# Altium PCB 175-00002 rev 2, PCB, Sinistro Clock Gen.PcbDoc (part 1 of 6)
Units mil, origin at the board's own origin, x right, y up, seen from the top; angles counter-clockwise.
Board outline 5905.51 x 4330.71 mil, 10 copper layers (Top Layer (.GTL), MidLayer1 (*.G1), +12V (*.GP1), -12V (*.GP2), A & GND (*.GP3), Chassis E (*.GP4), +28V & VCC (*.GP5), MidLayer2 (*.G2), MidLayer3 (*.G3), Bottom Layer (.GBL)), stack 64.6 mil thick; 495 components, 327 nets, 1939 pads, 938 vias.
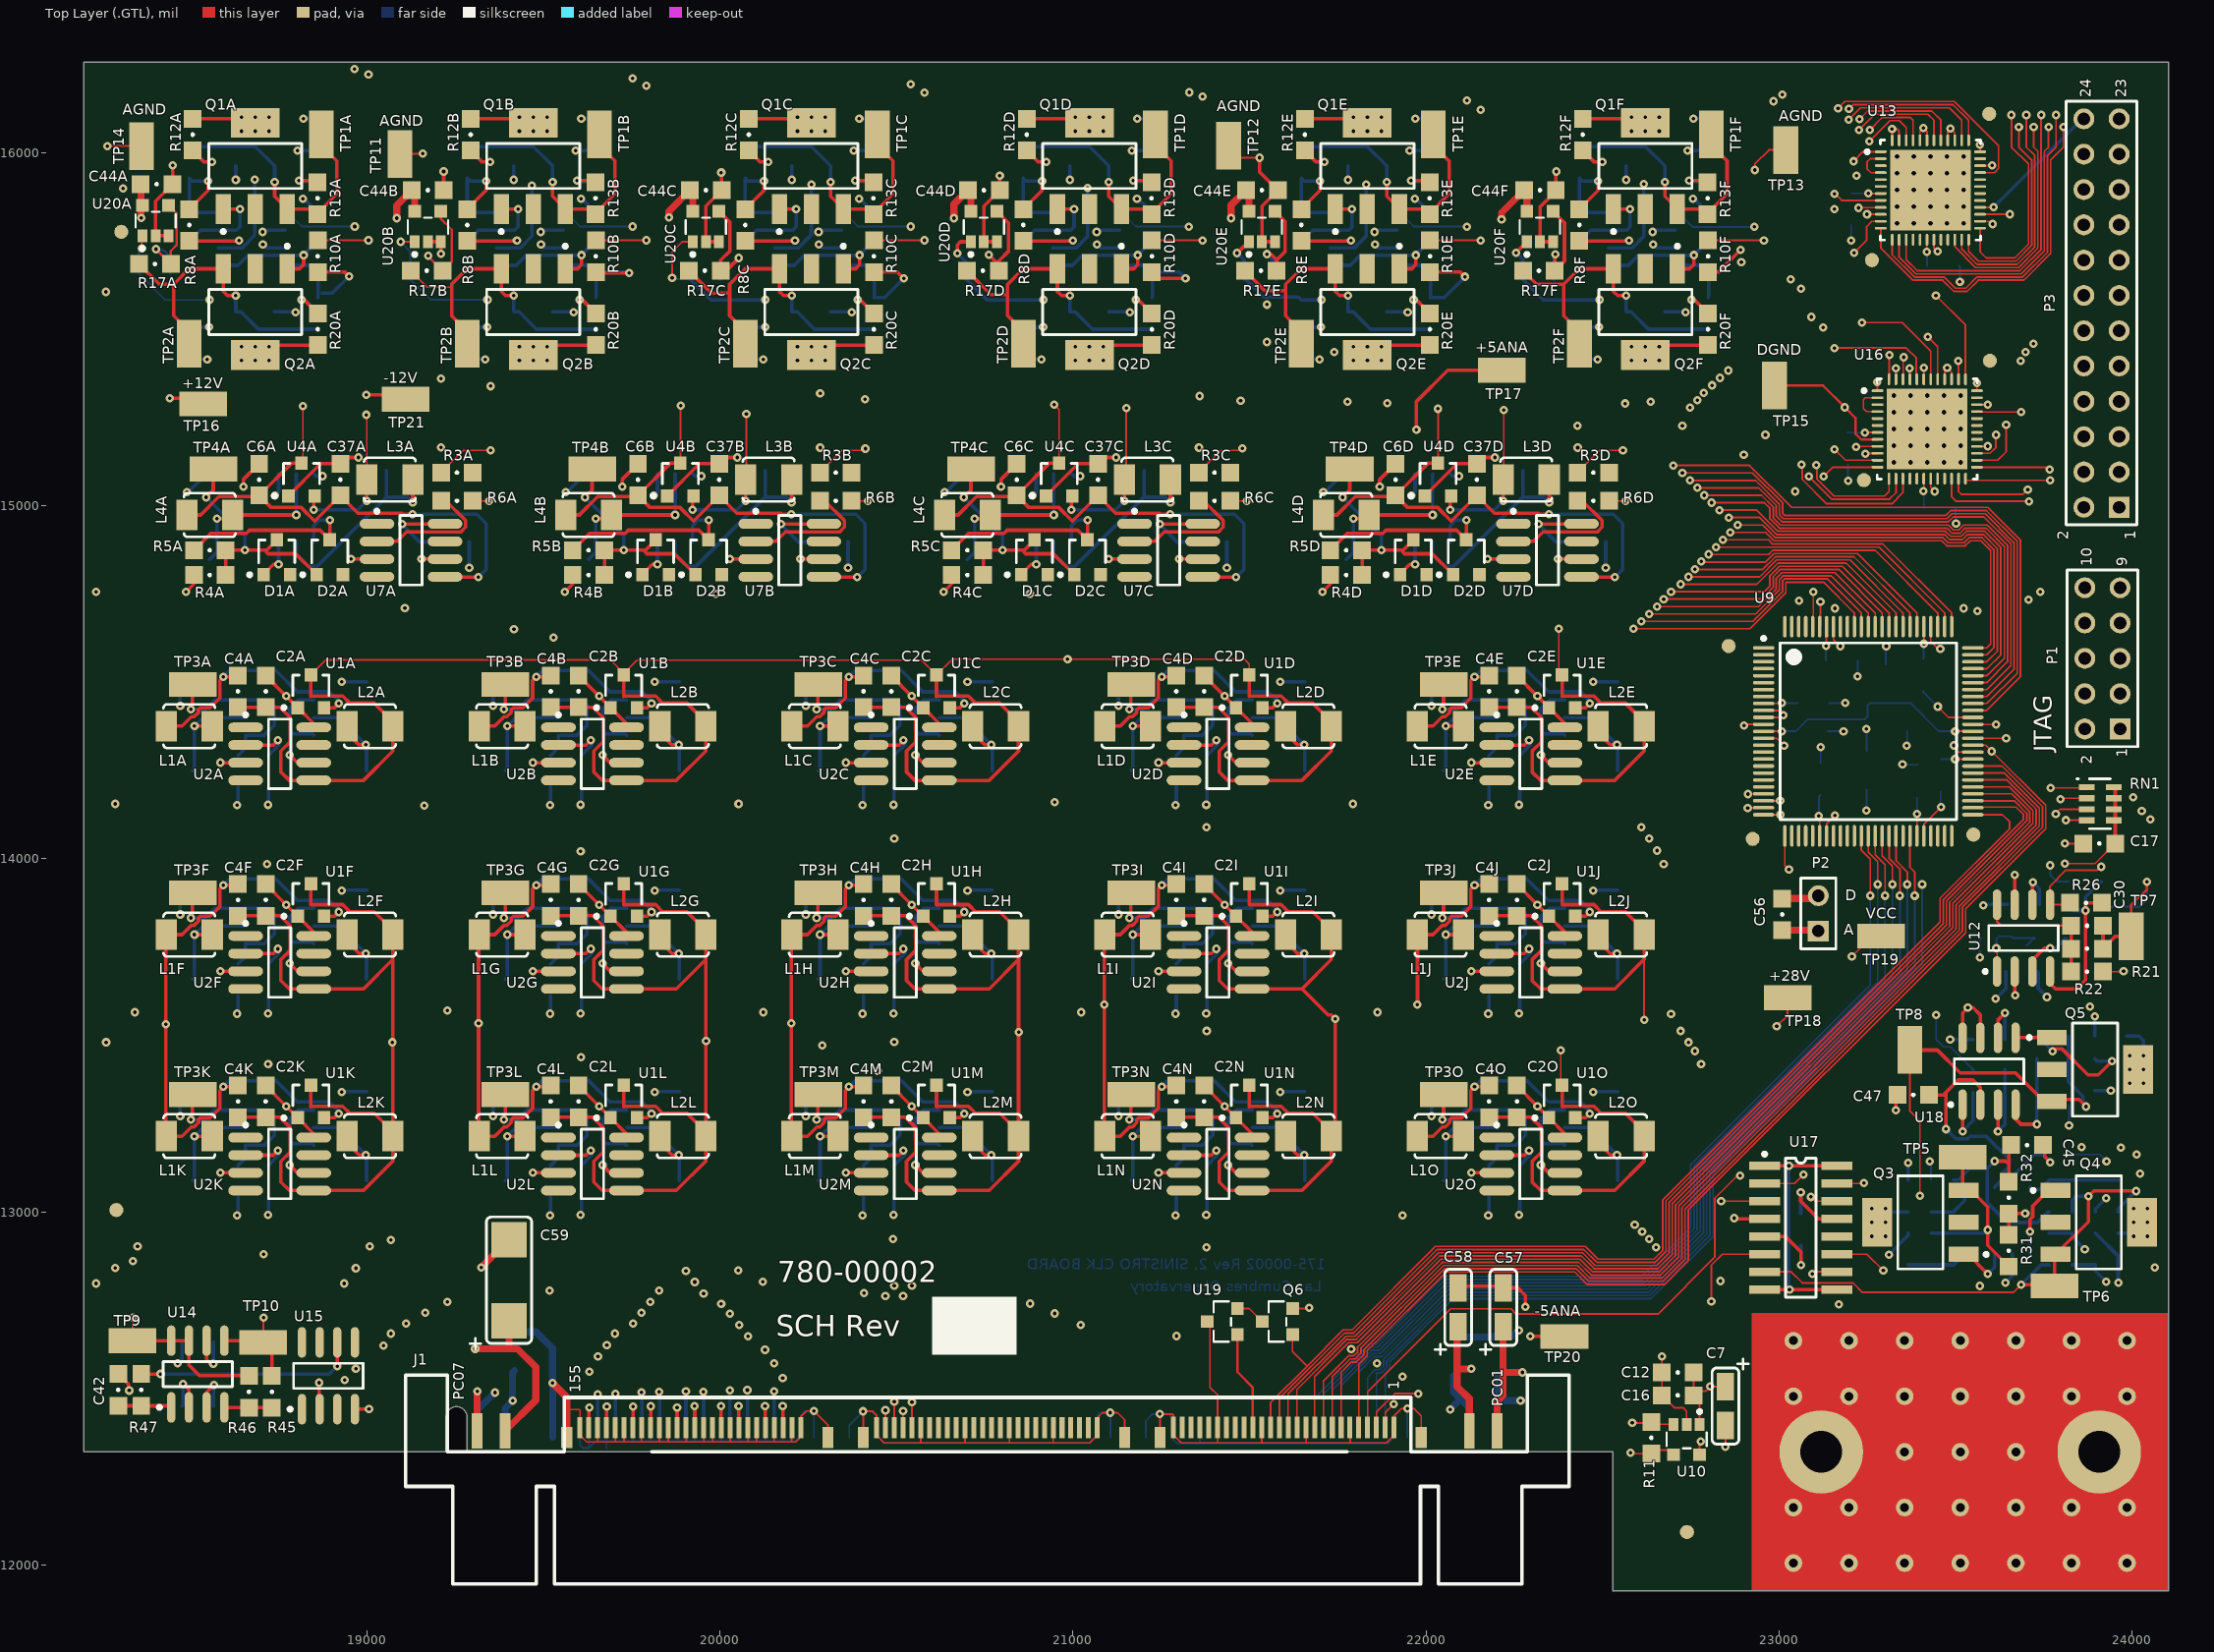
[diagram p0: Top Layer (.GTL) view]
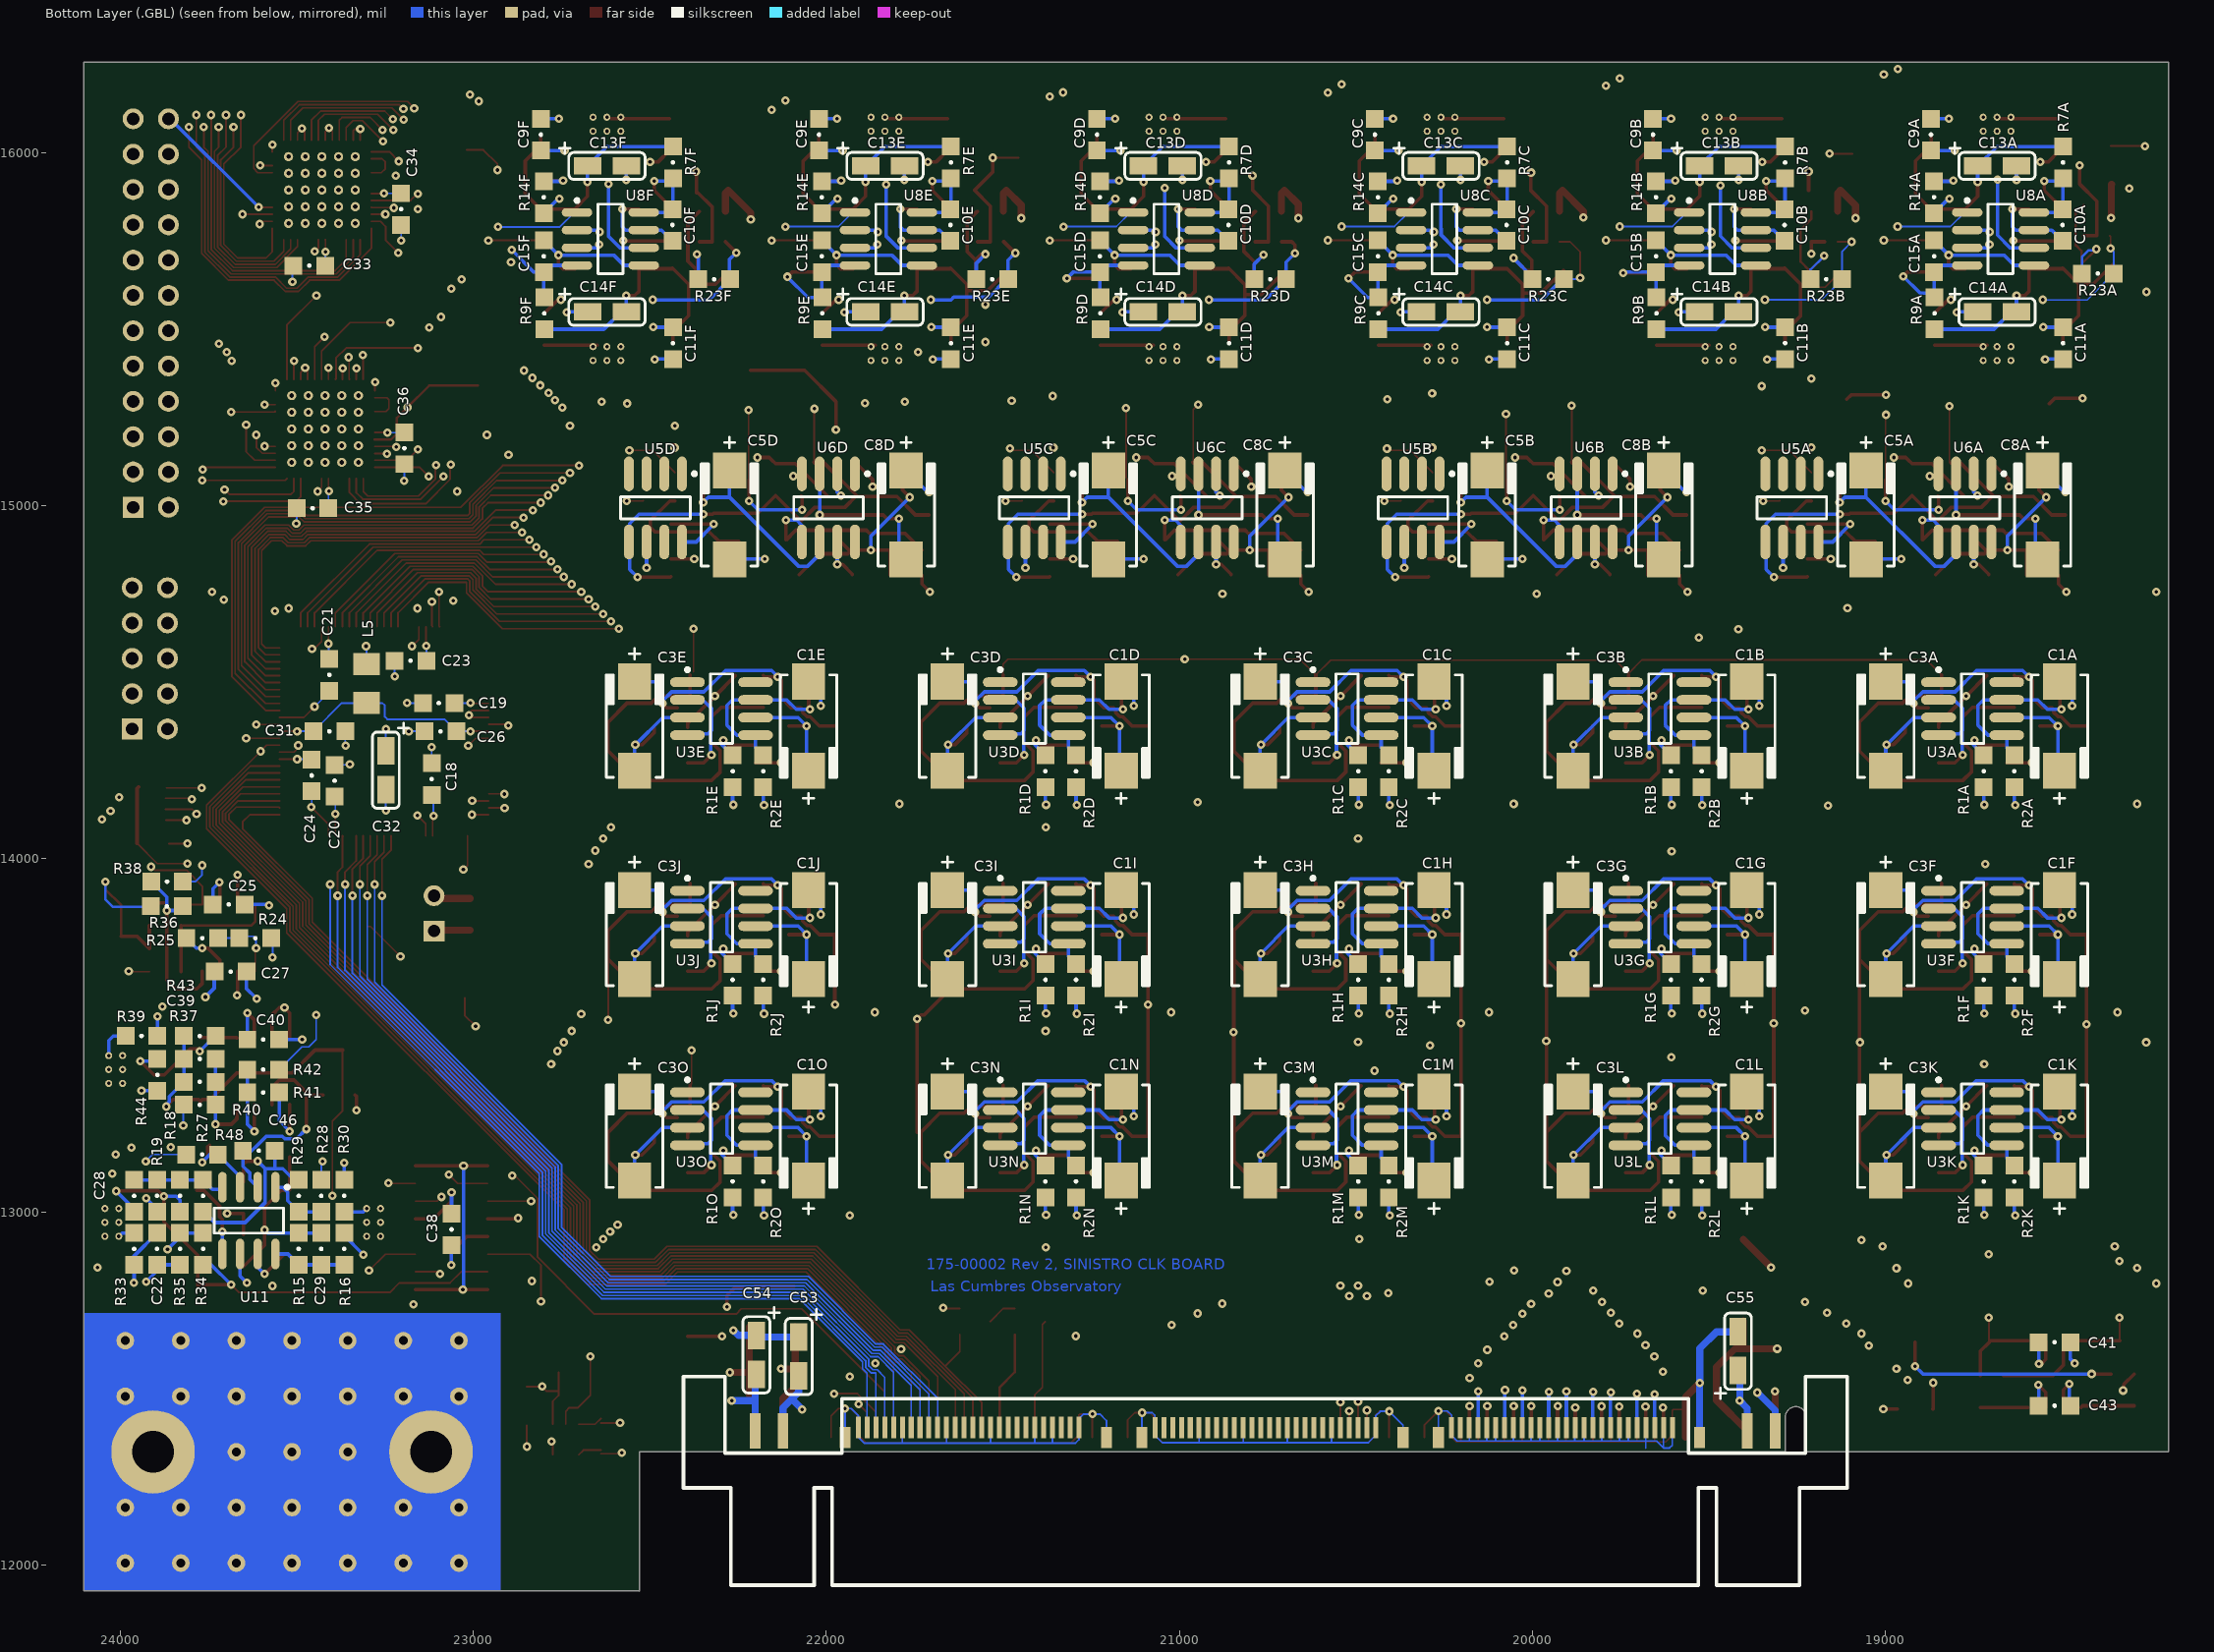
[diagram p1: Bottom Layer (.GBL) view, seen from below]
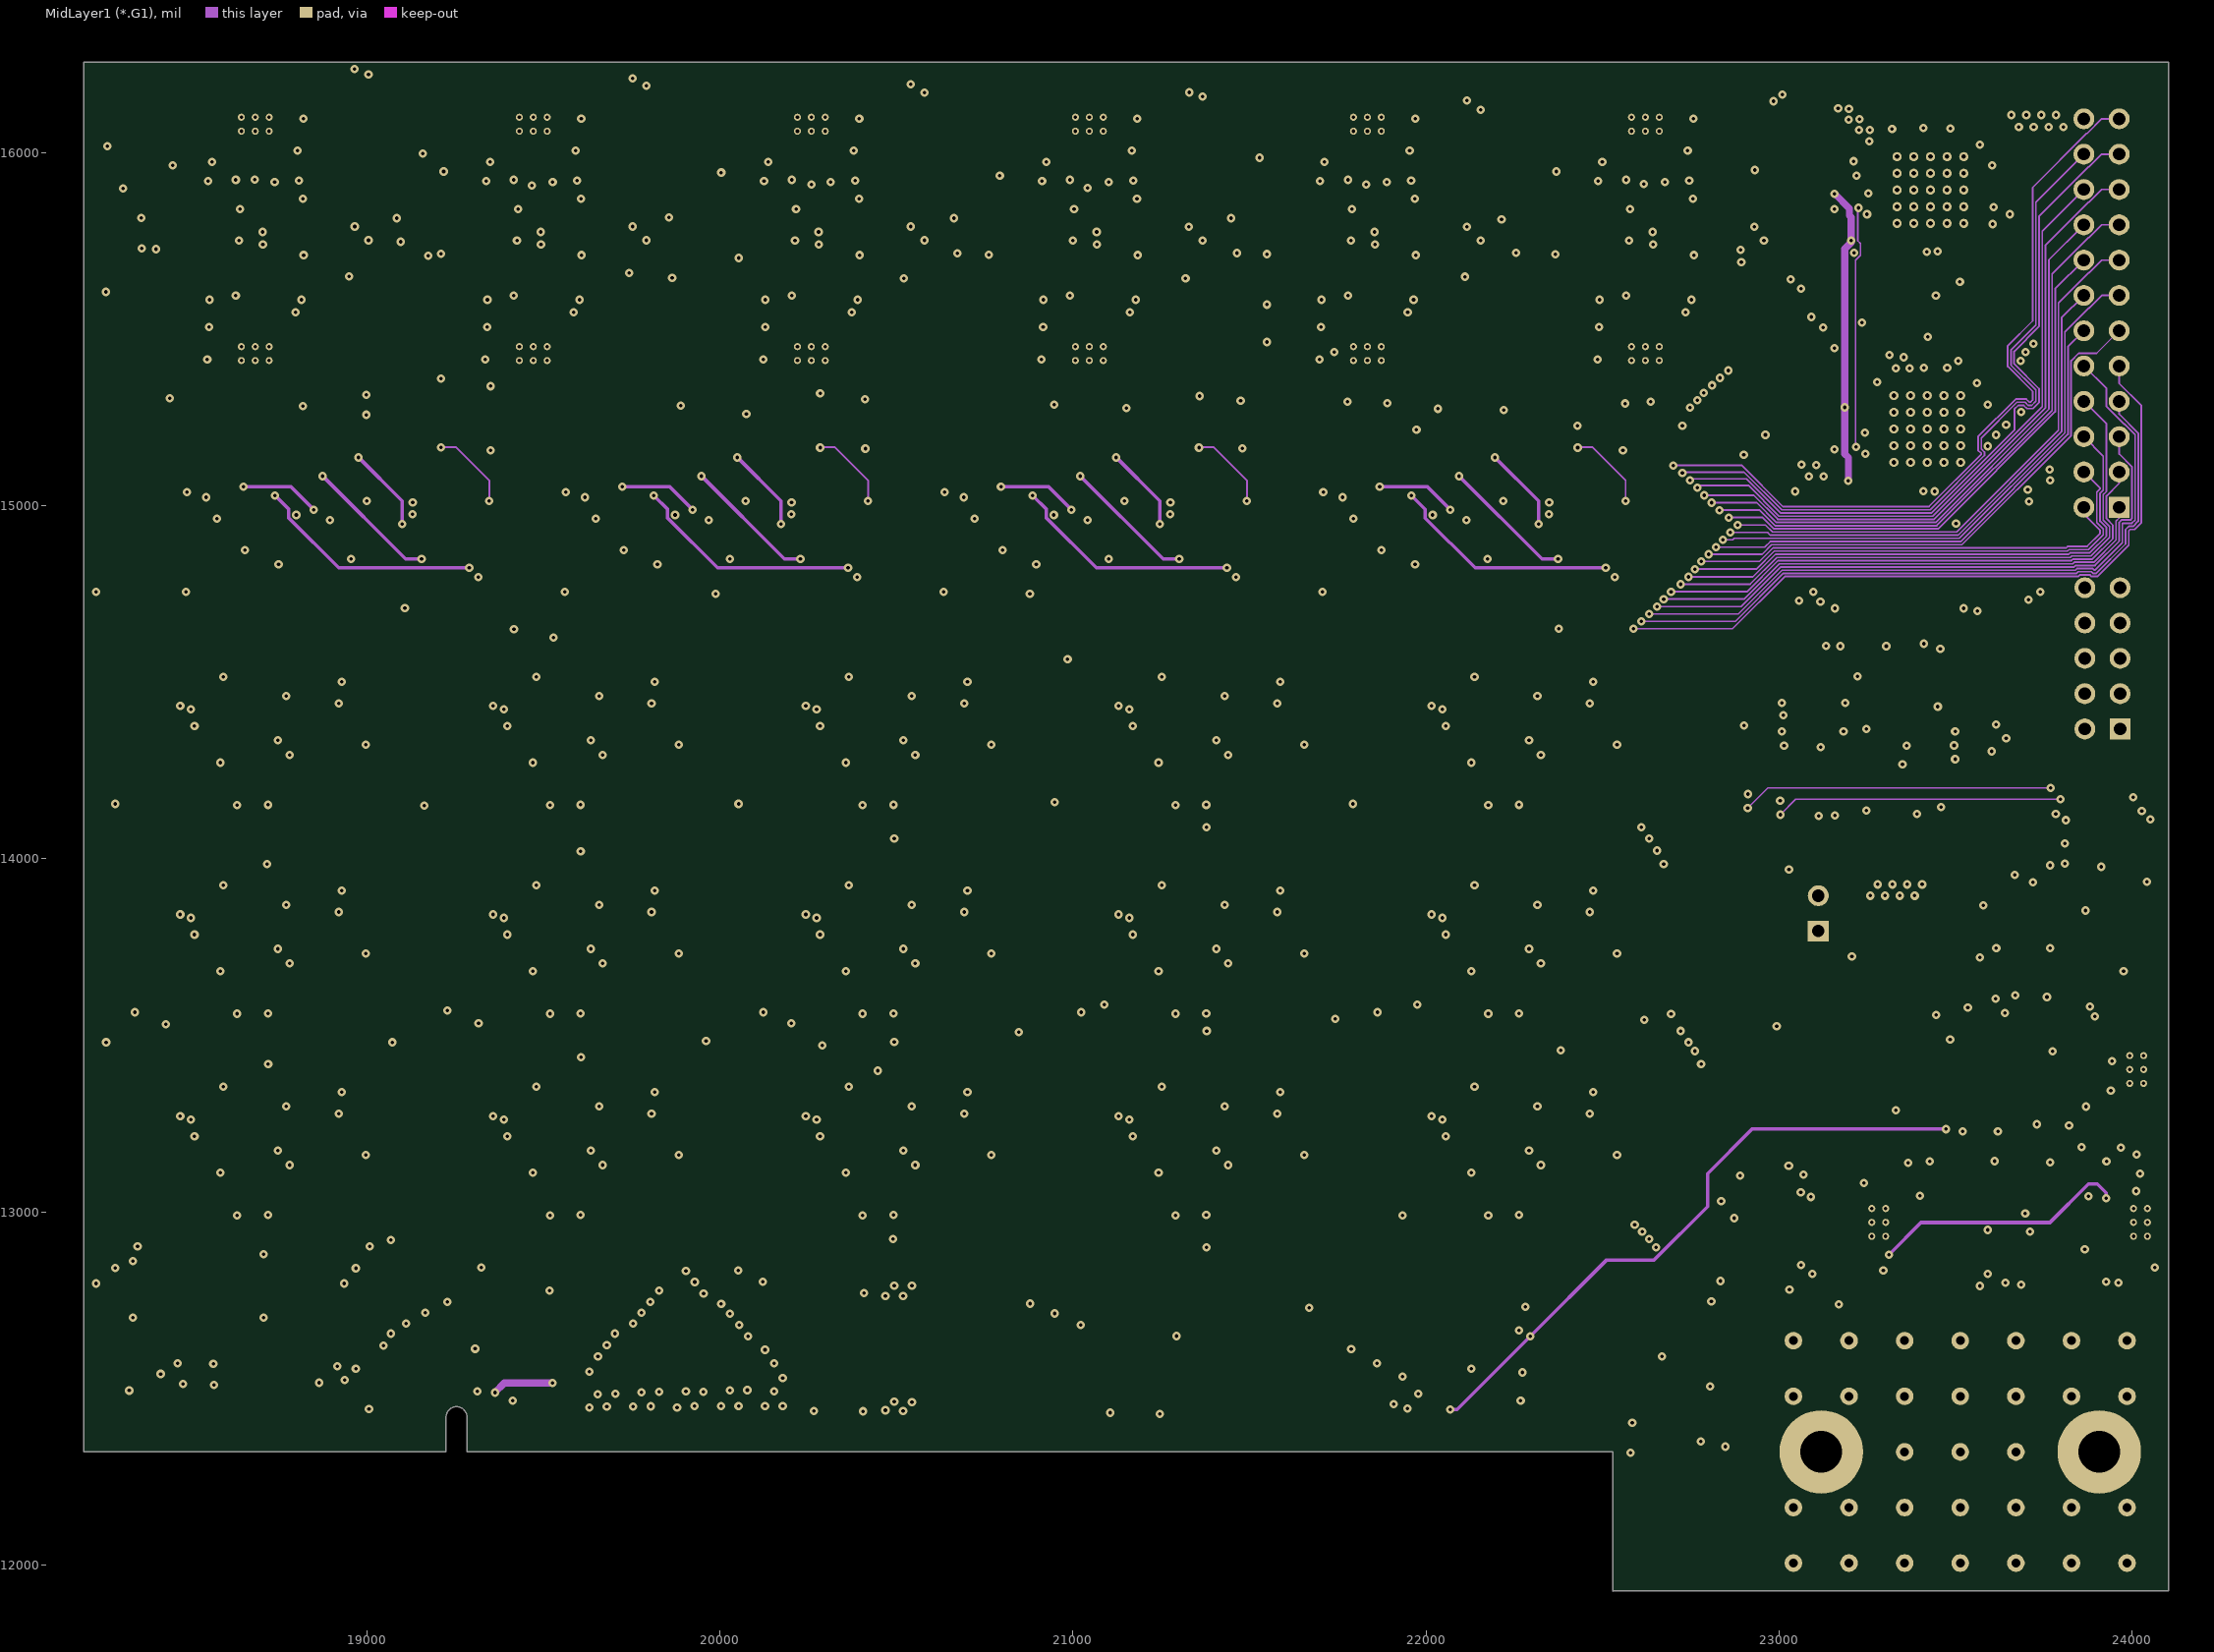
[diagram p2: MidLayer1 (*.G1)]
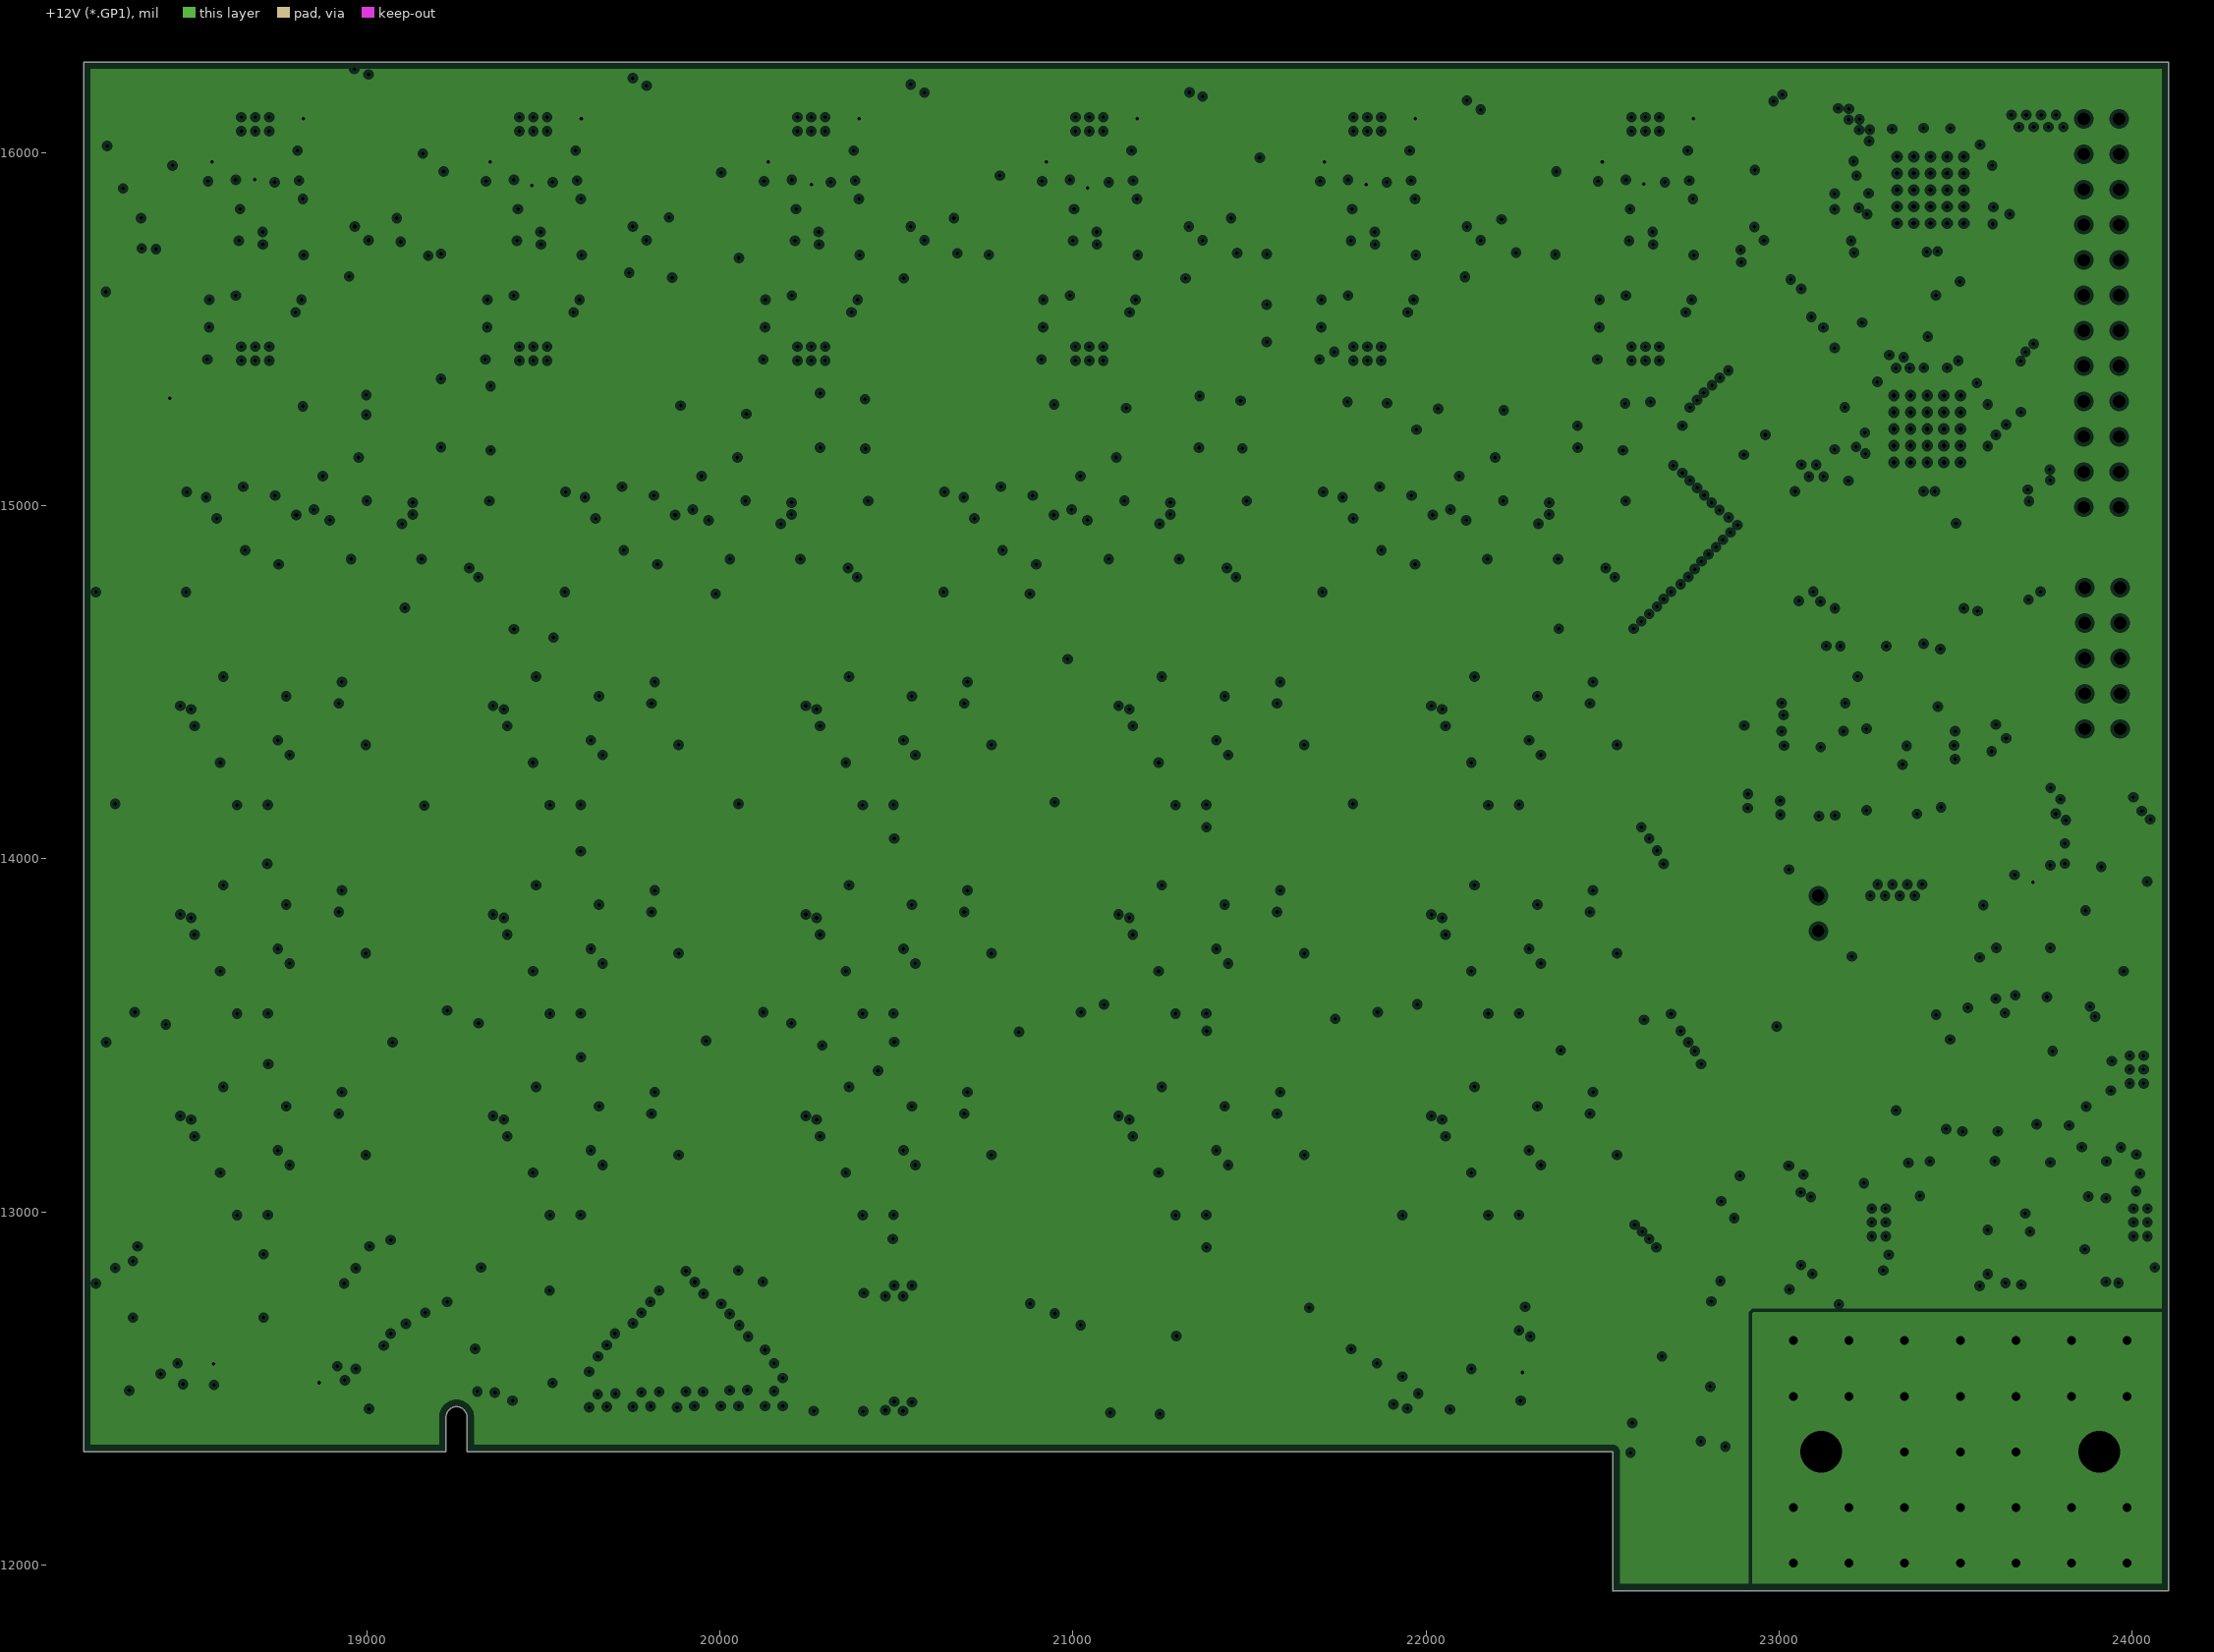
[diagram p3: +12V (*.GP1), clearances drawn from the general rule]
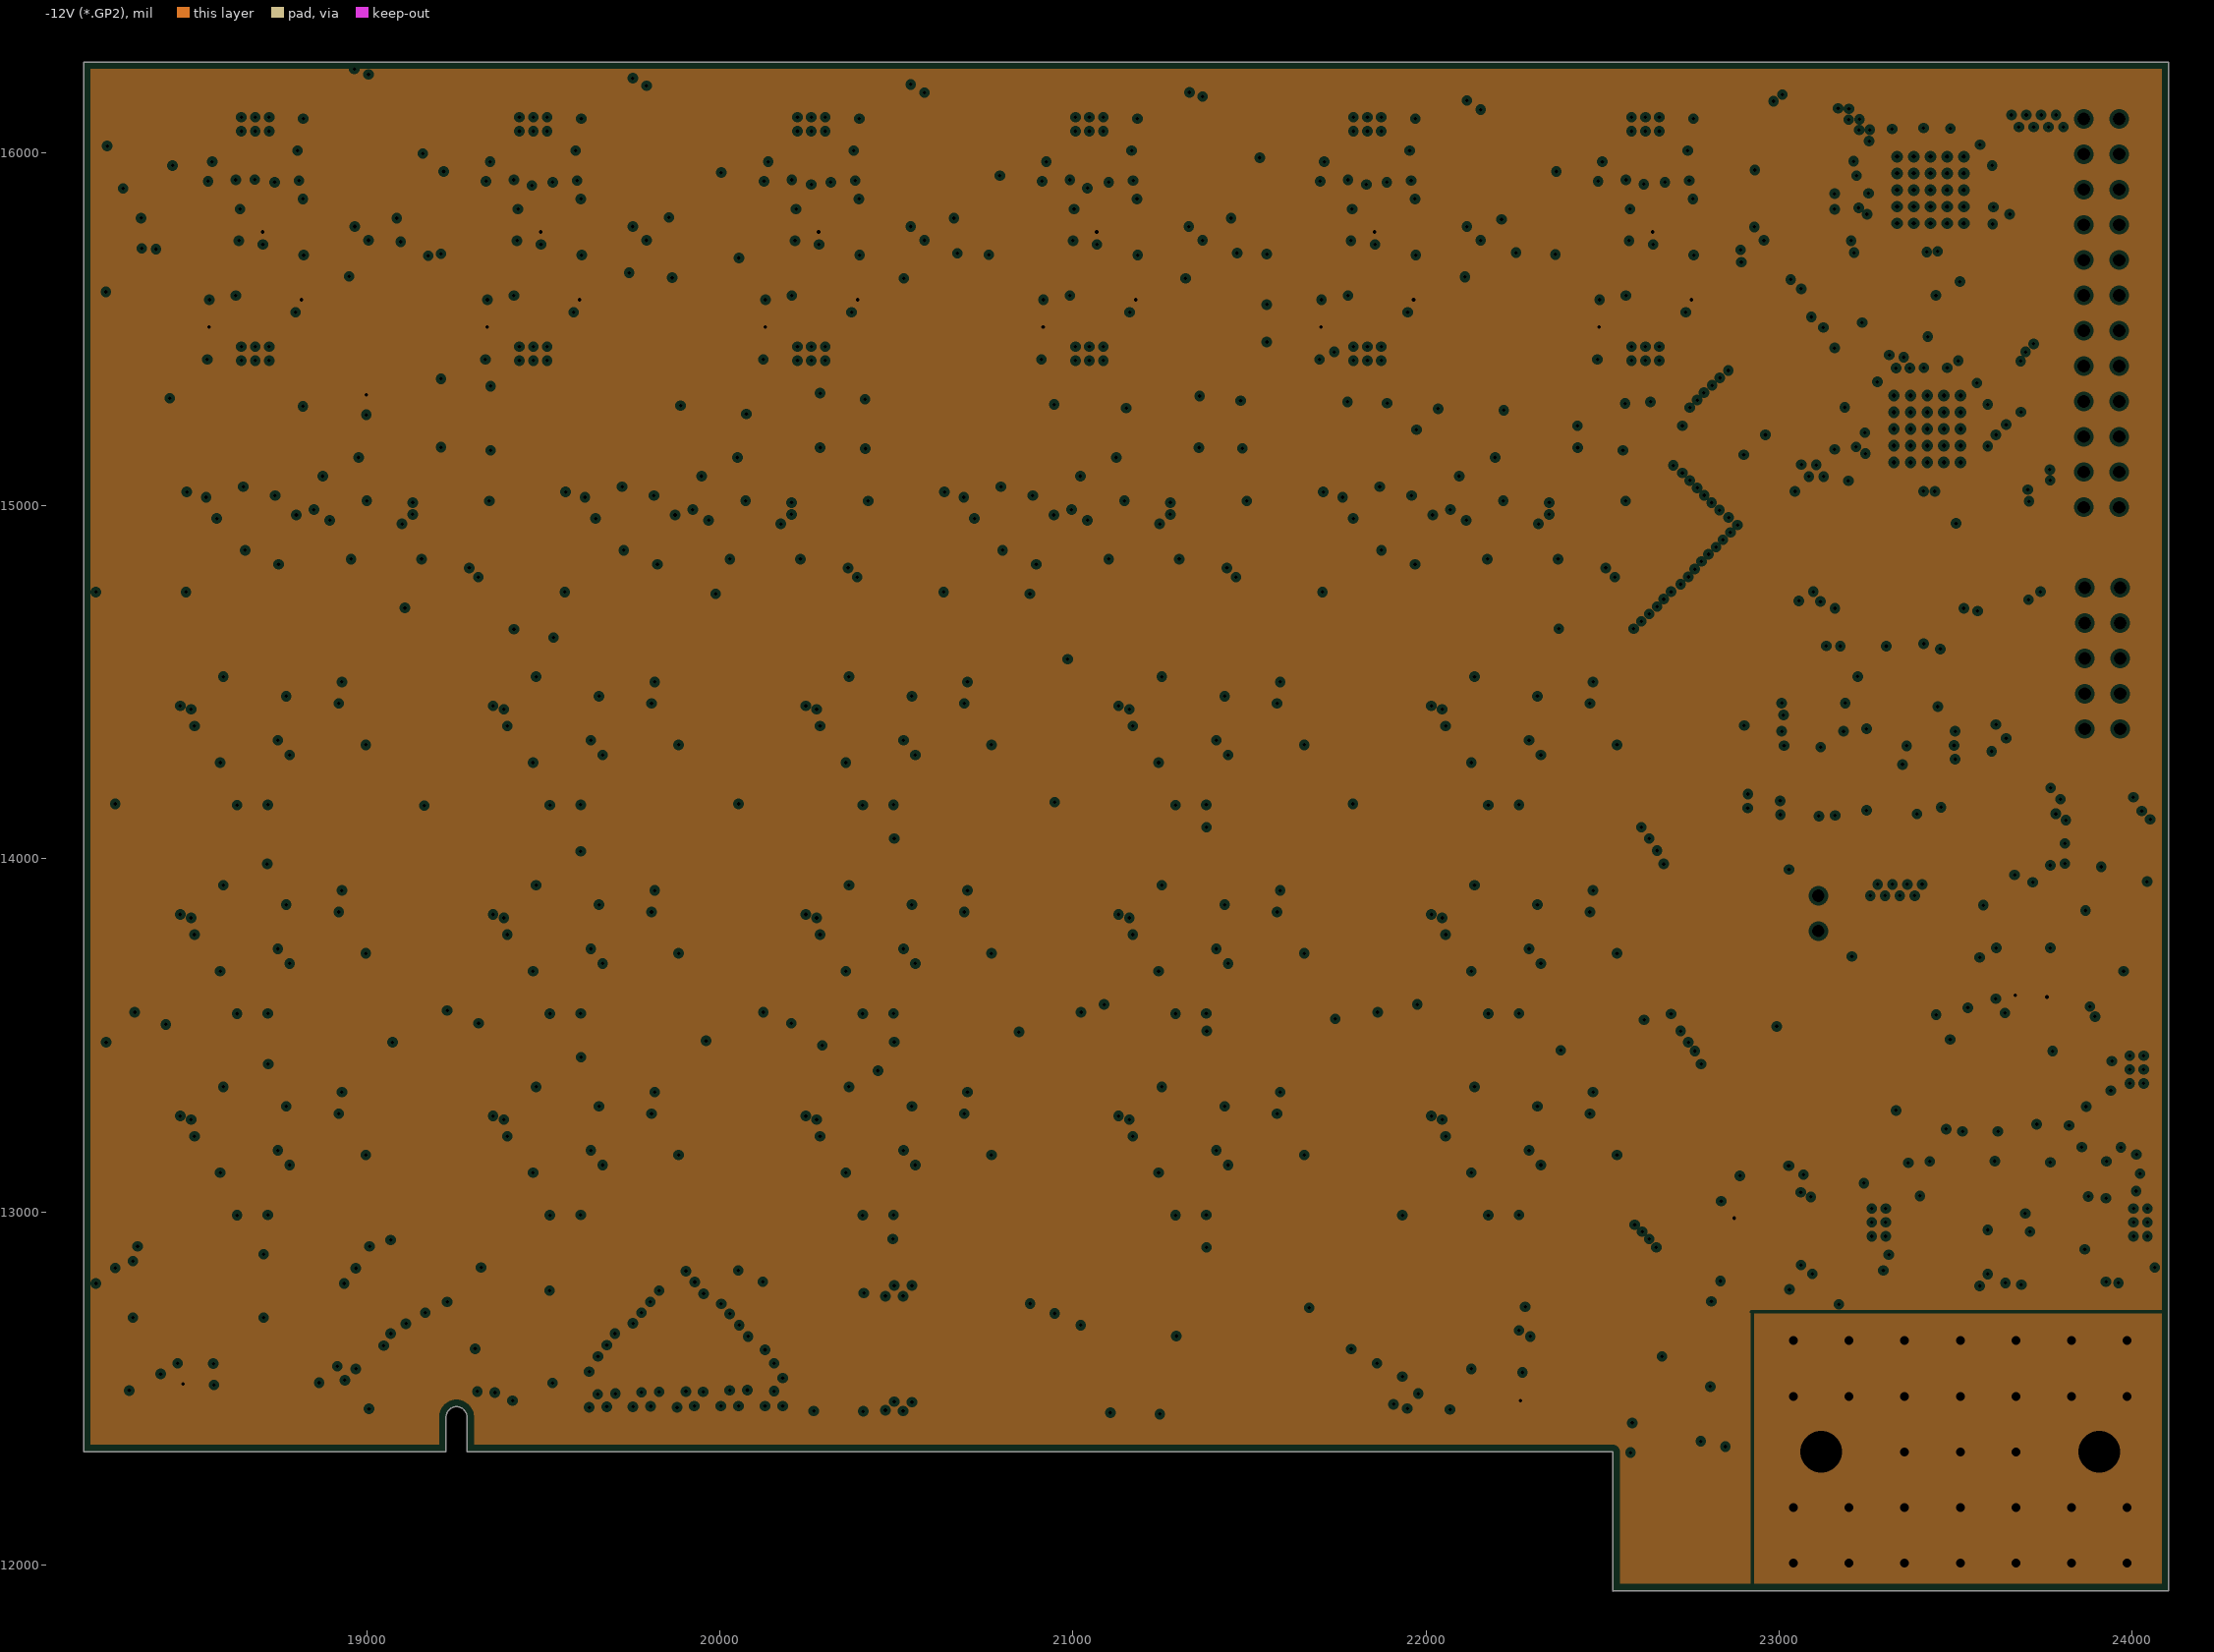
[diagram p4: -12V (*.GP2), clearances drawn from the general rule]
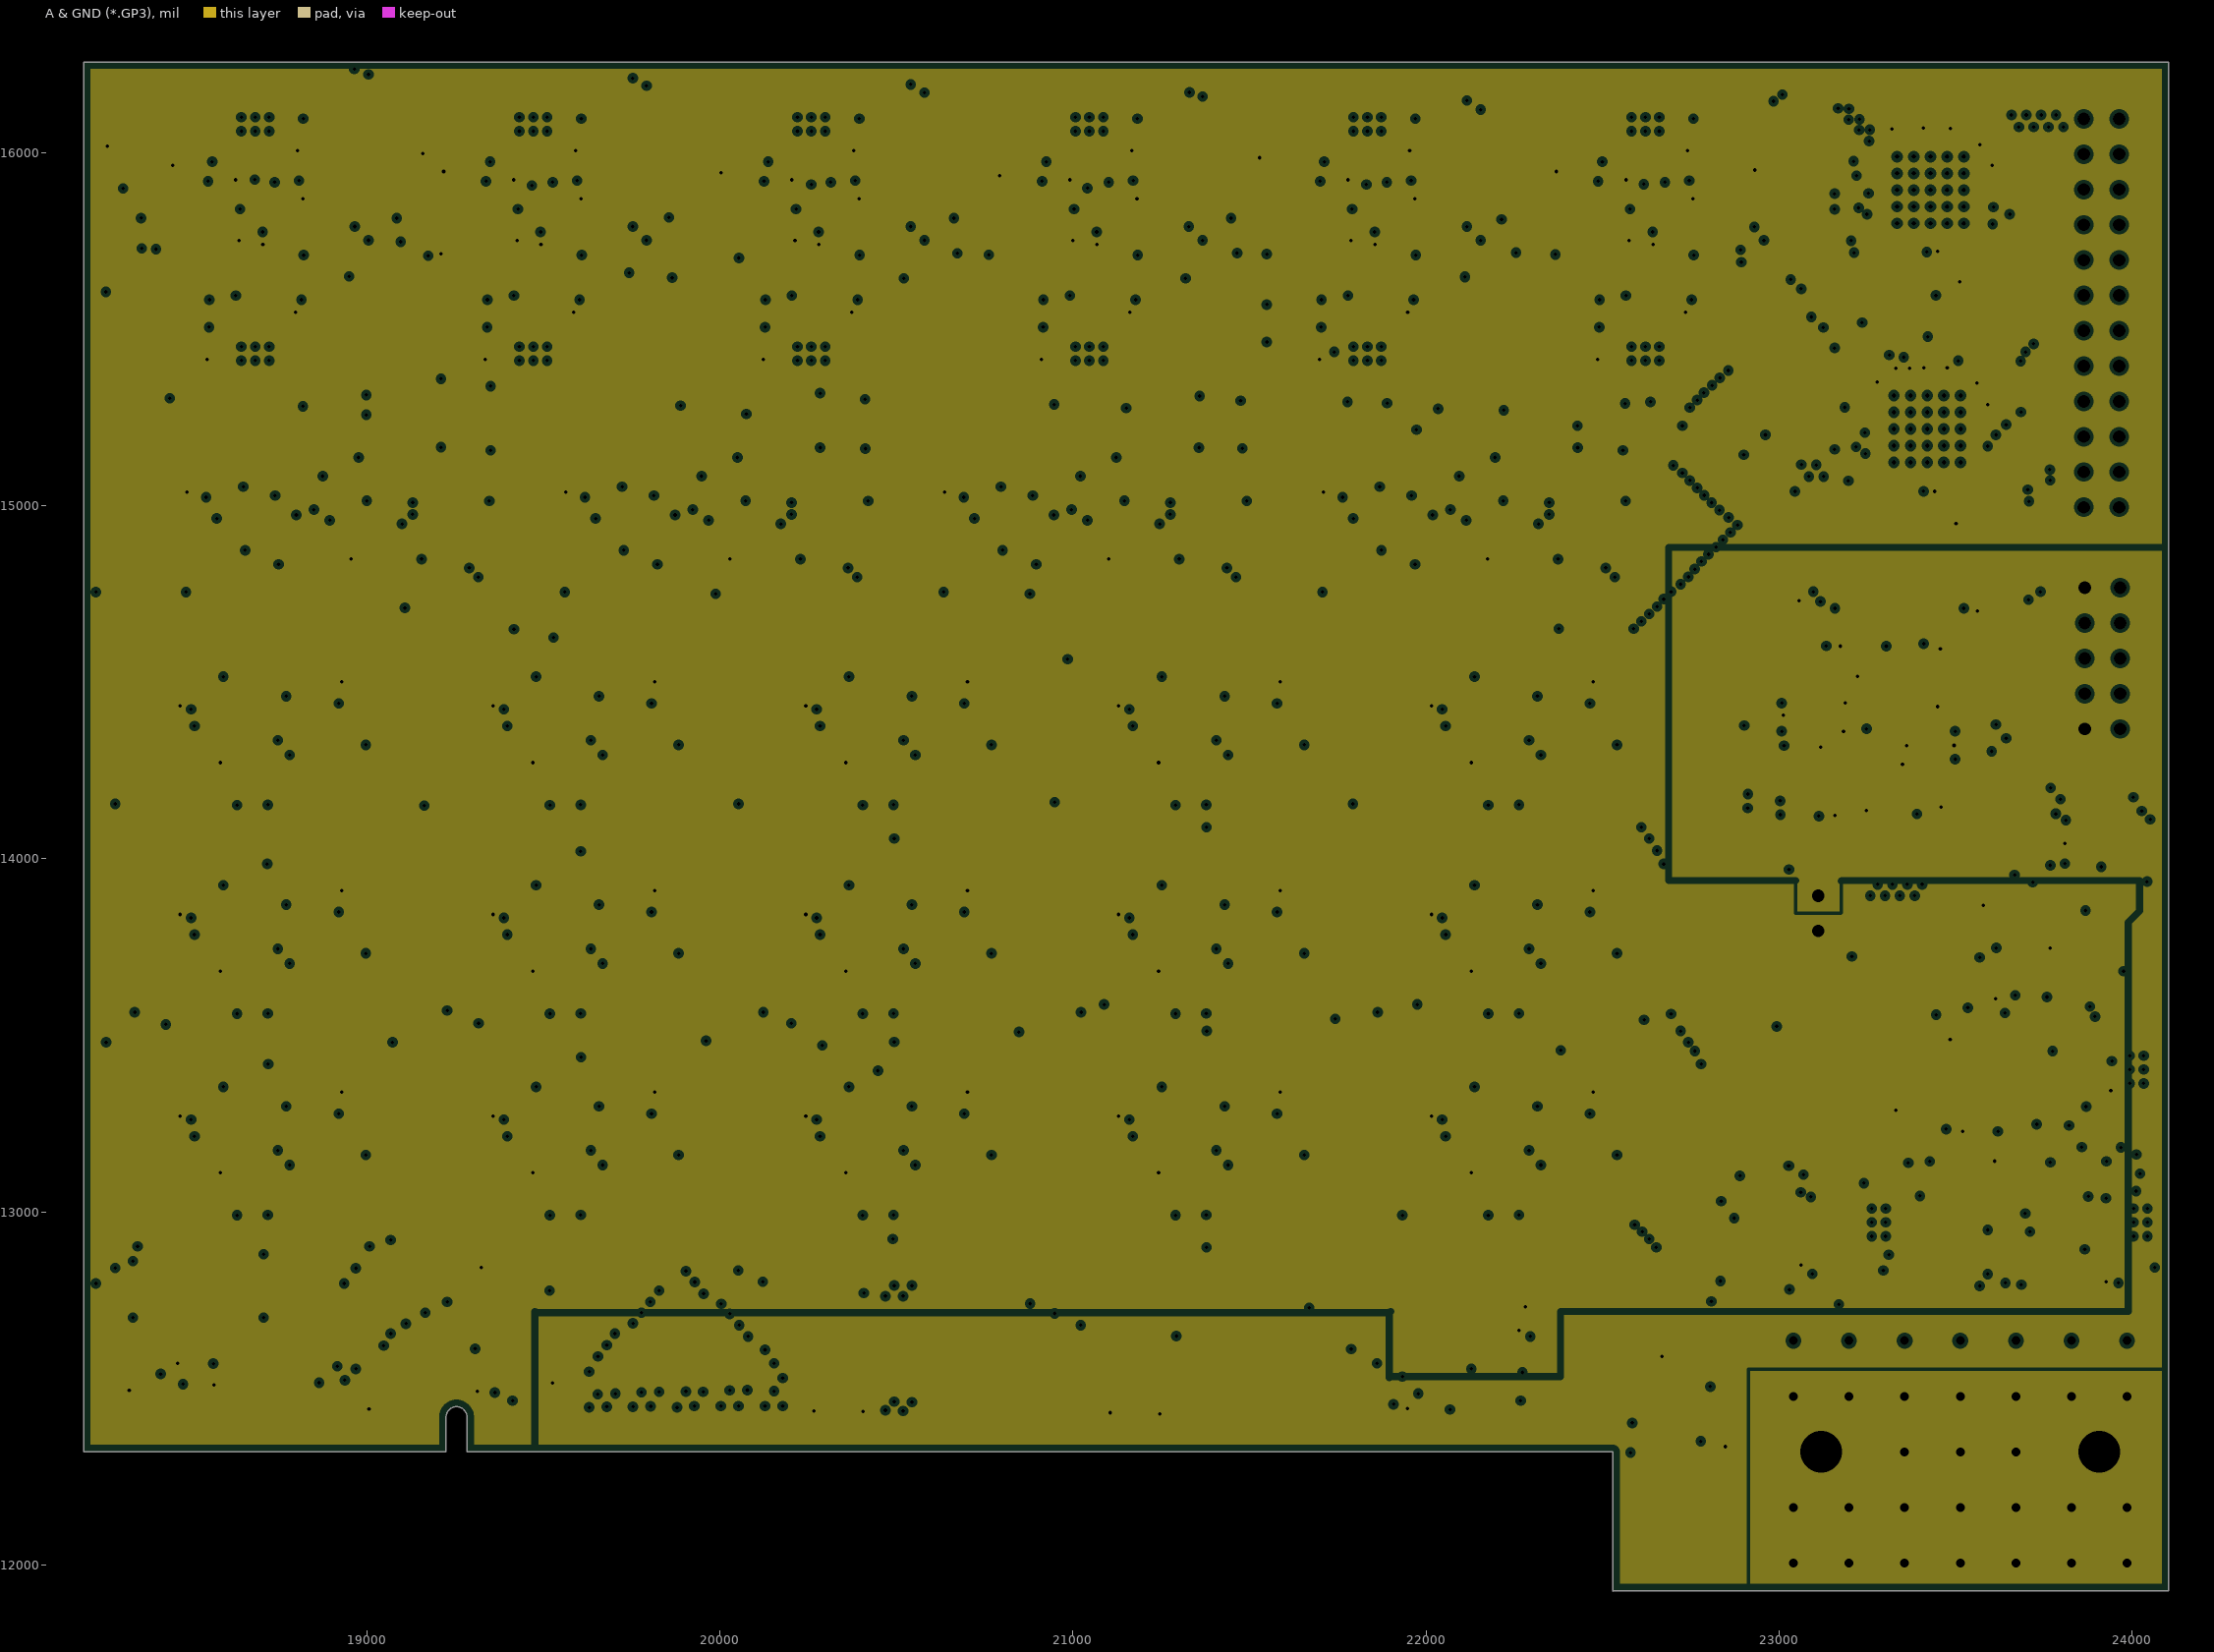
[diagram p5: A & GND (*.GP3), clearances drawn from the general rule]
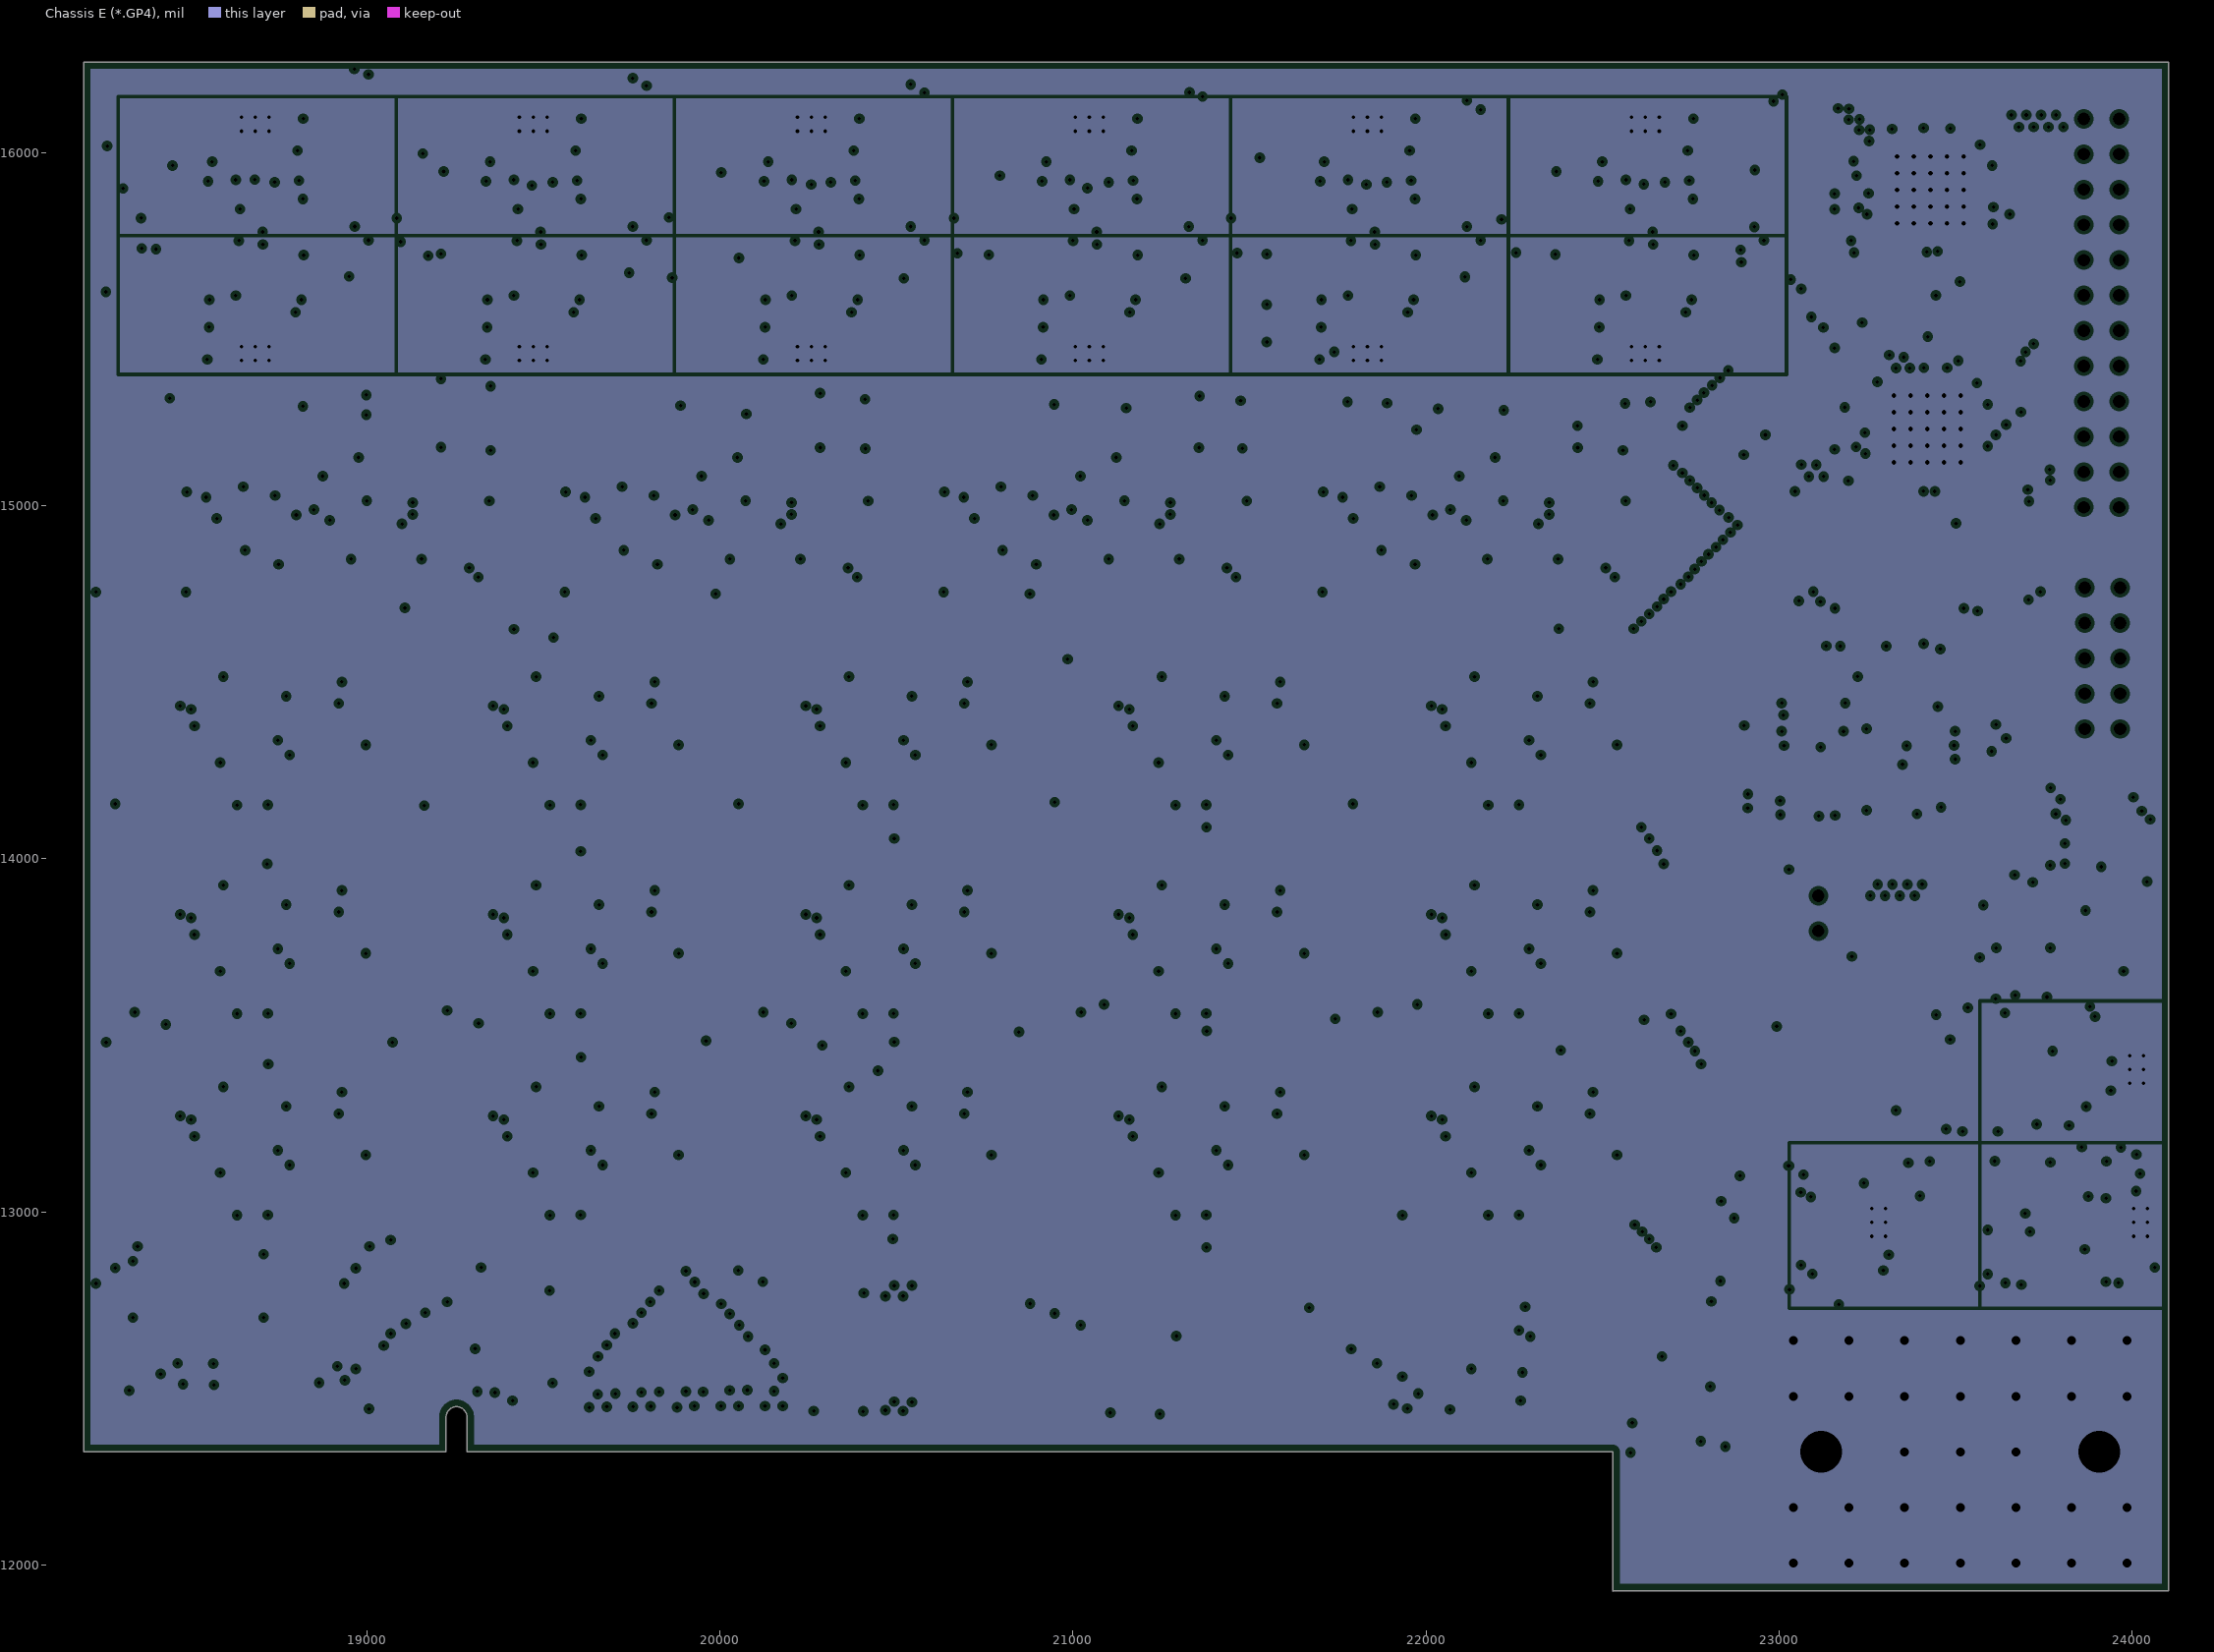
[diagram p6: Chassis E (*.GP4), clearances drawn from the general rule]
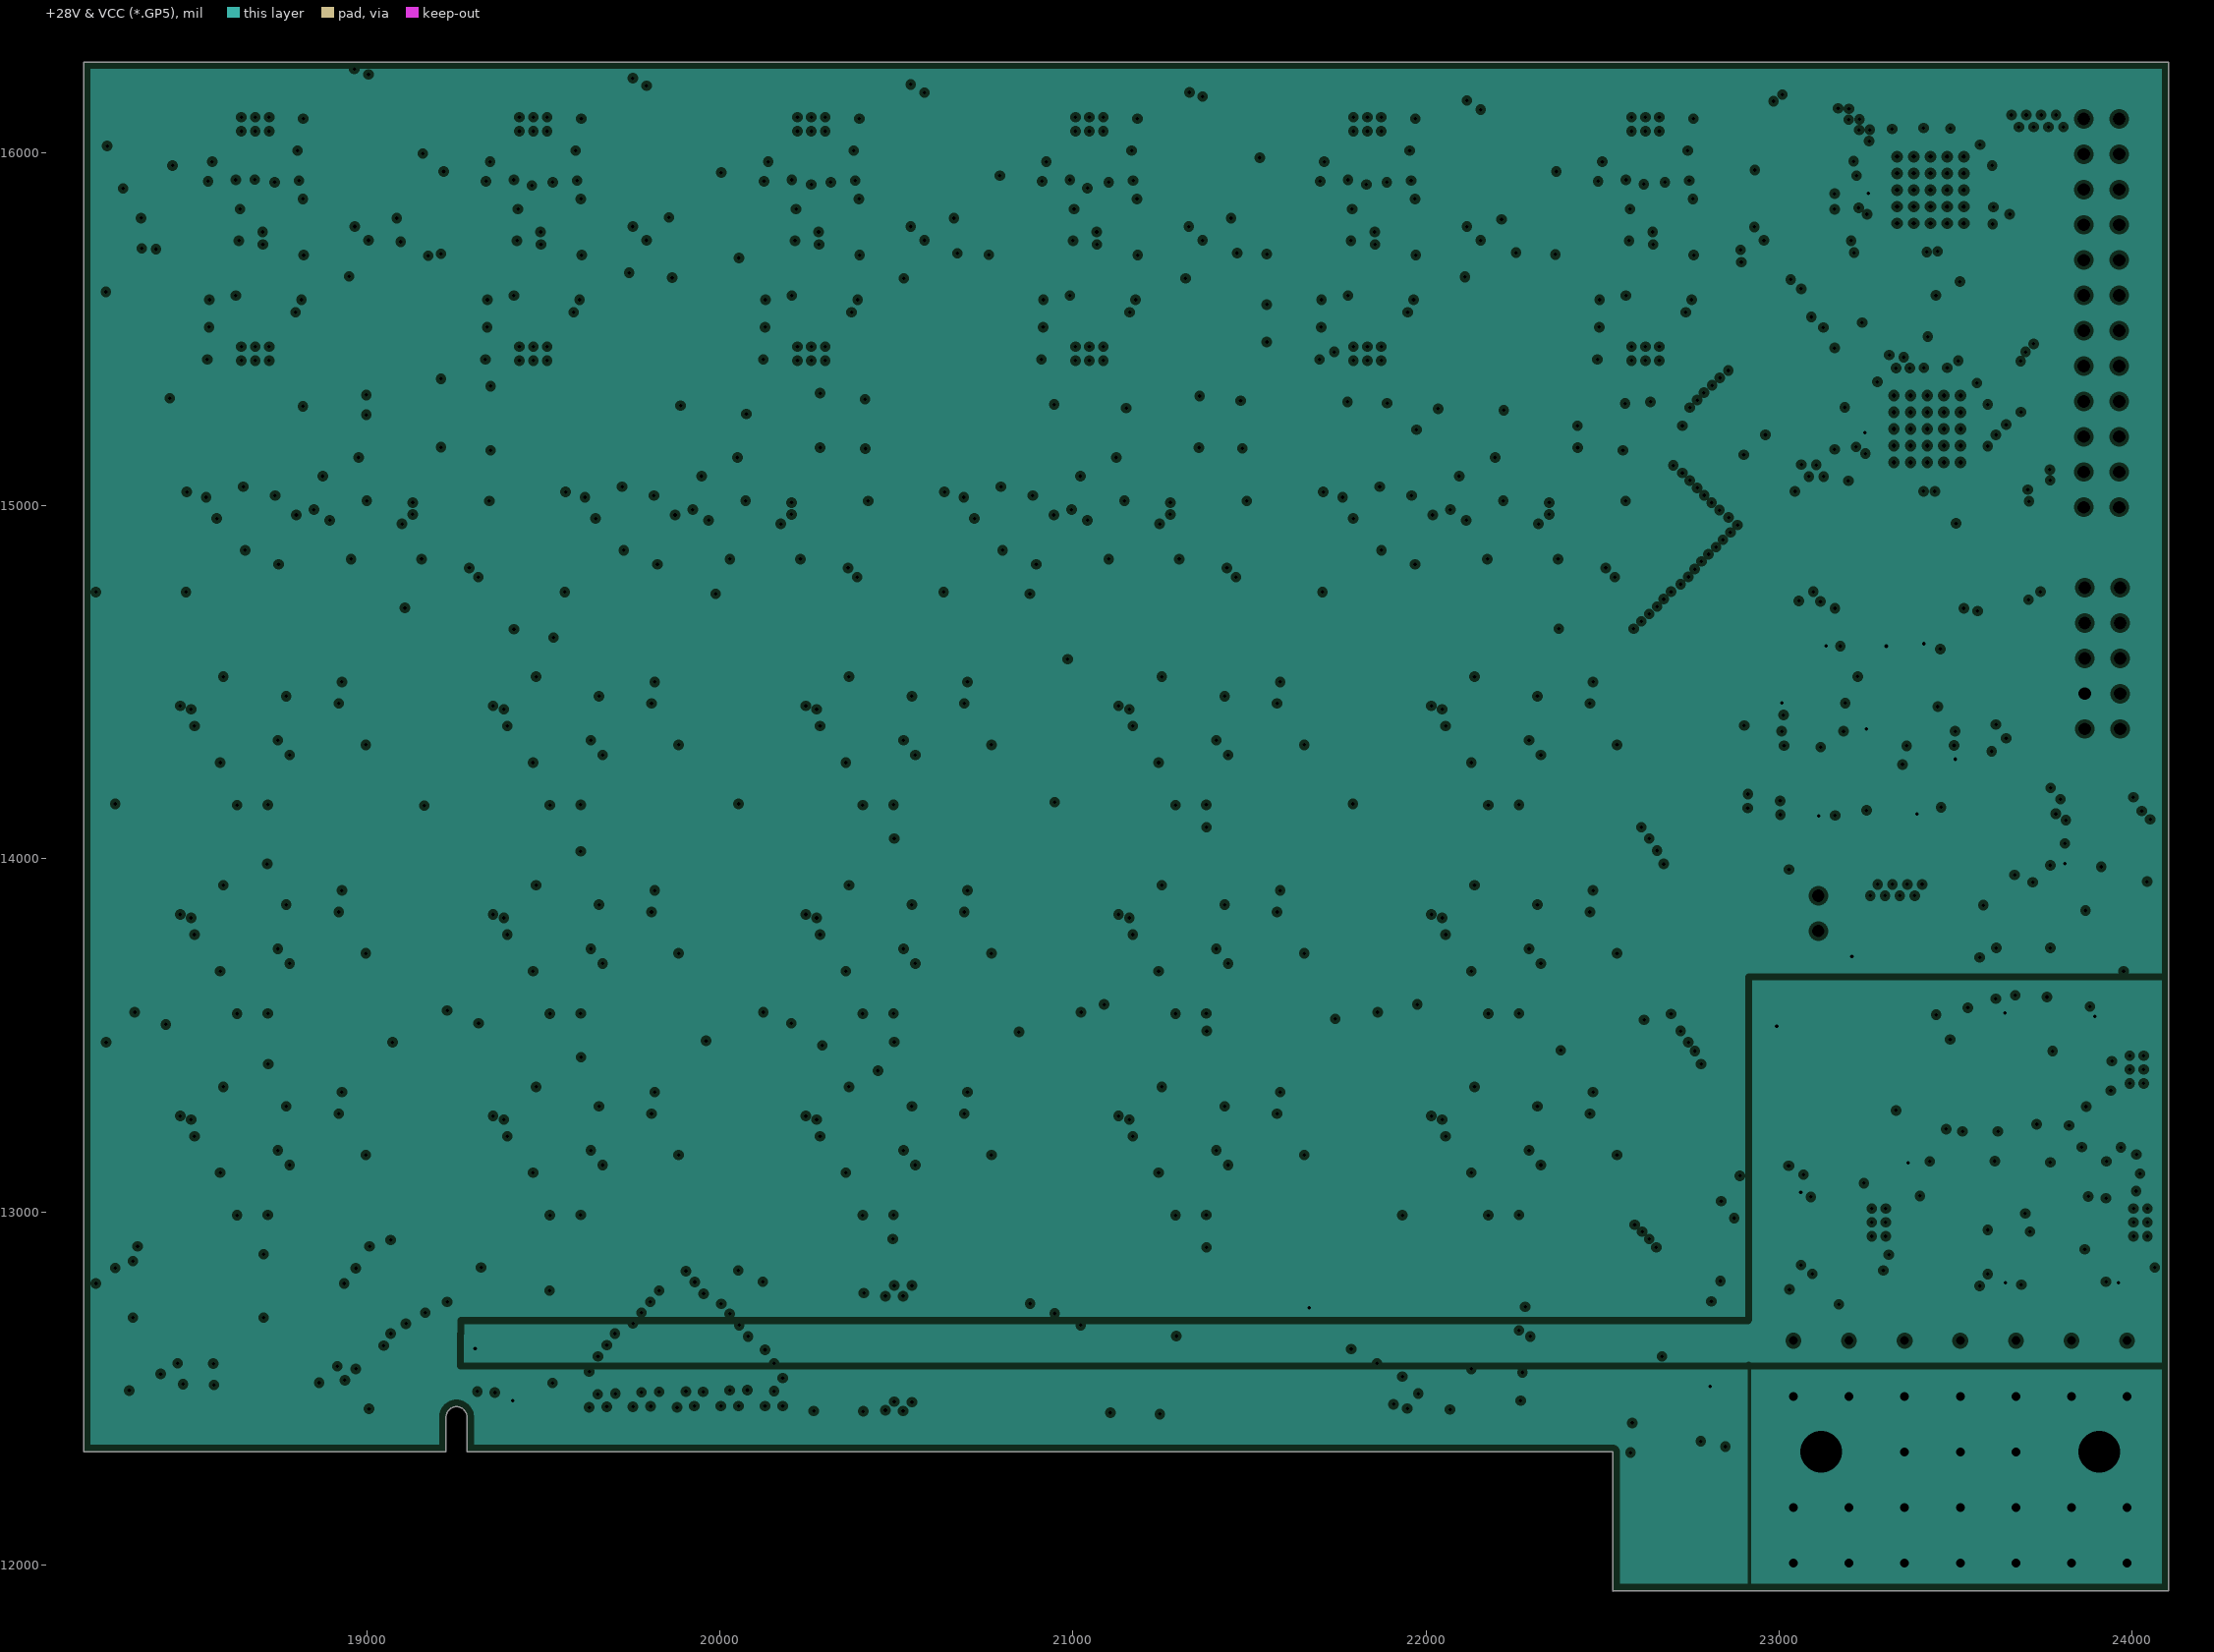
[diagram p7: +28V & VCC (*.GP5), clearances drawn from the general rule]
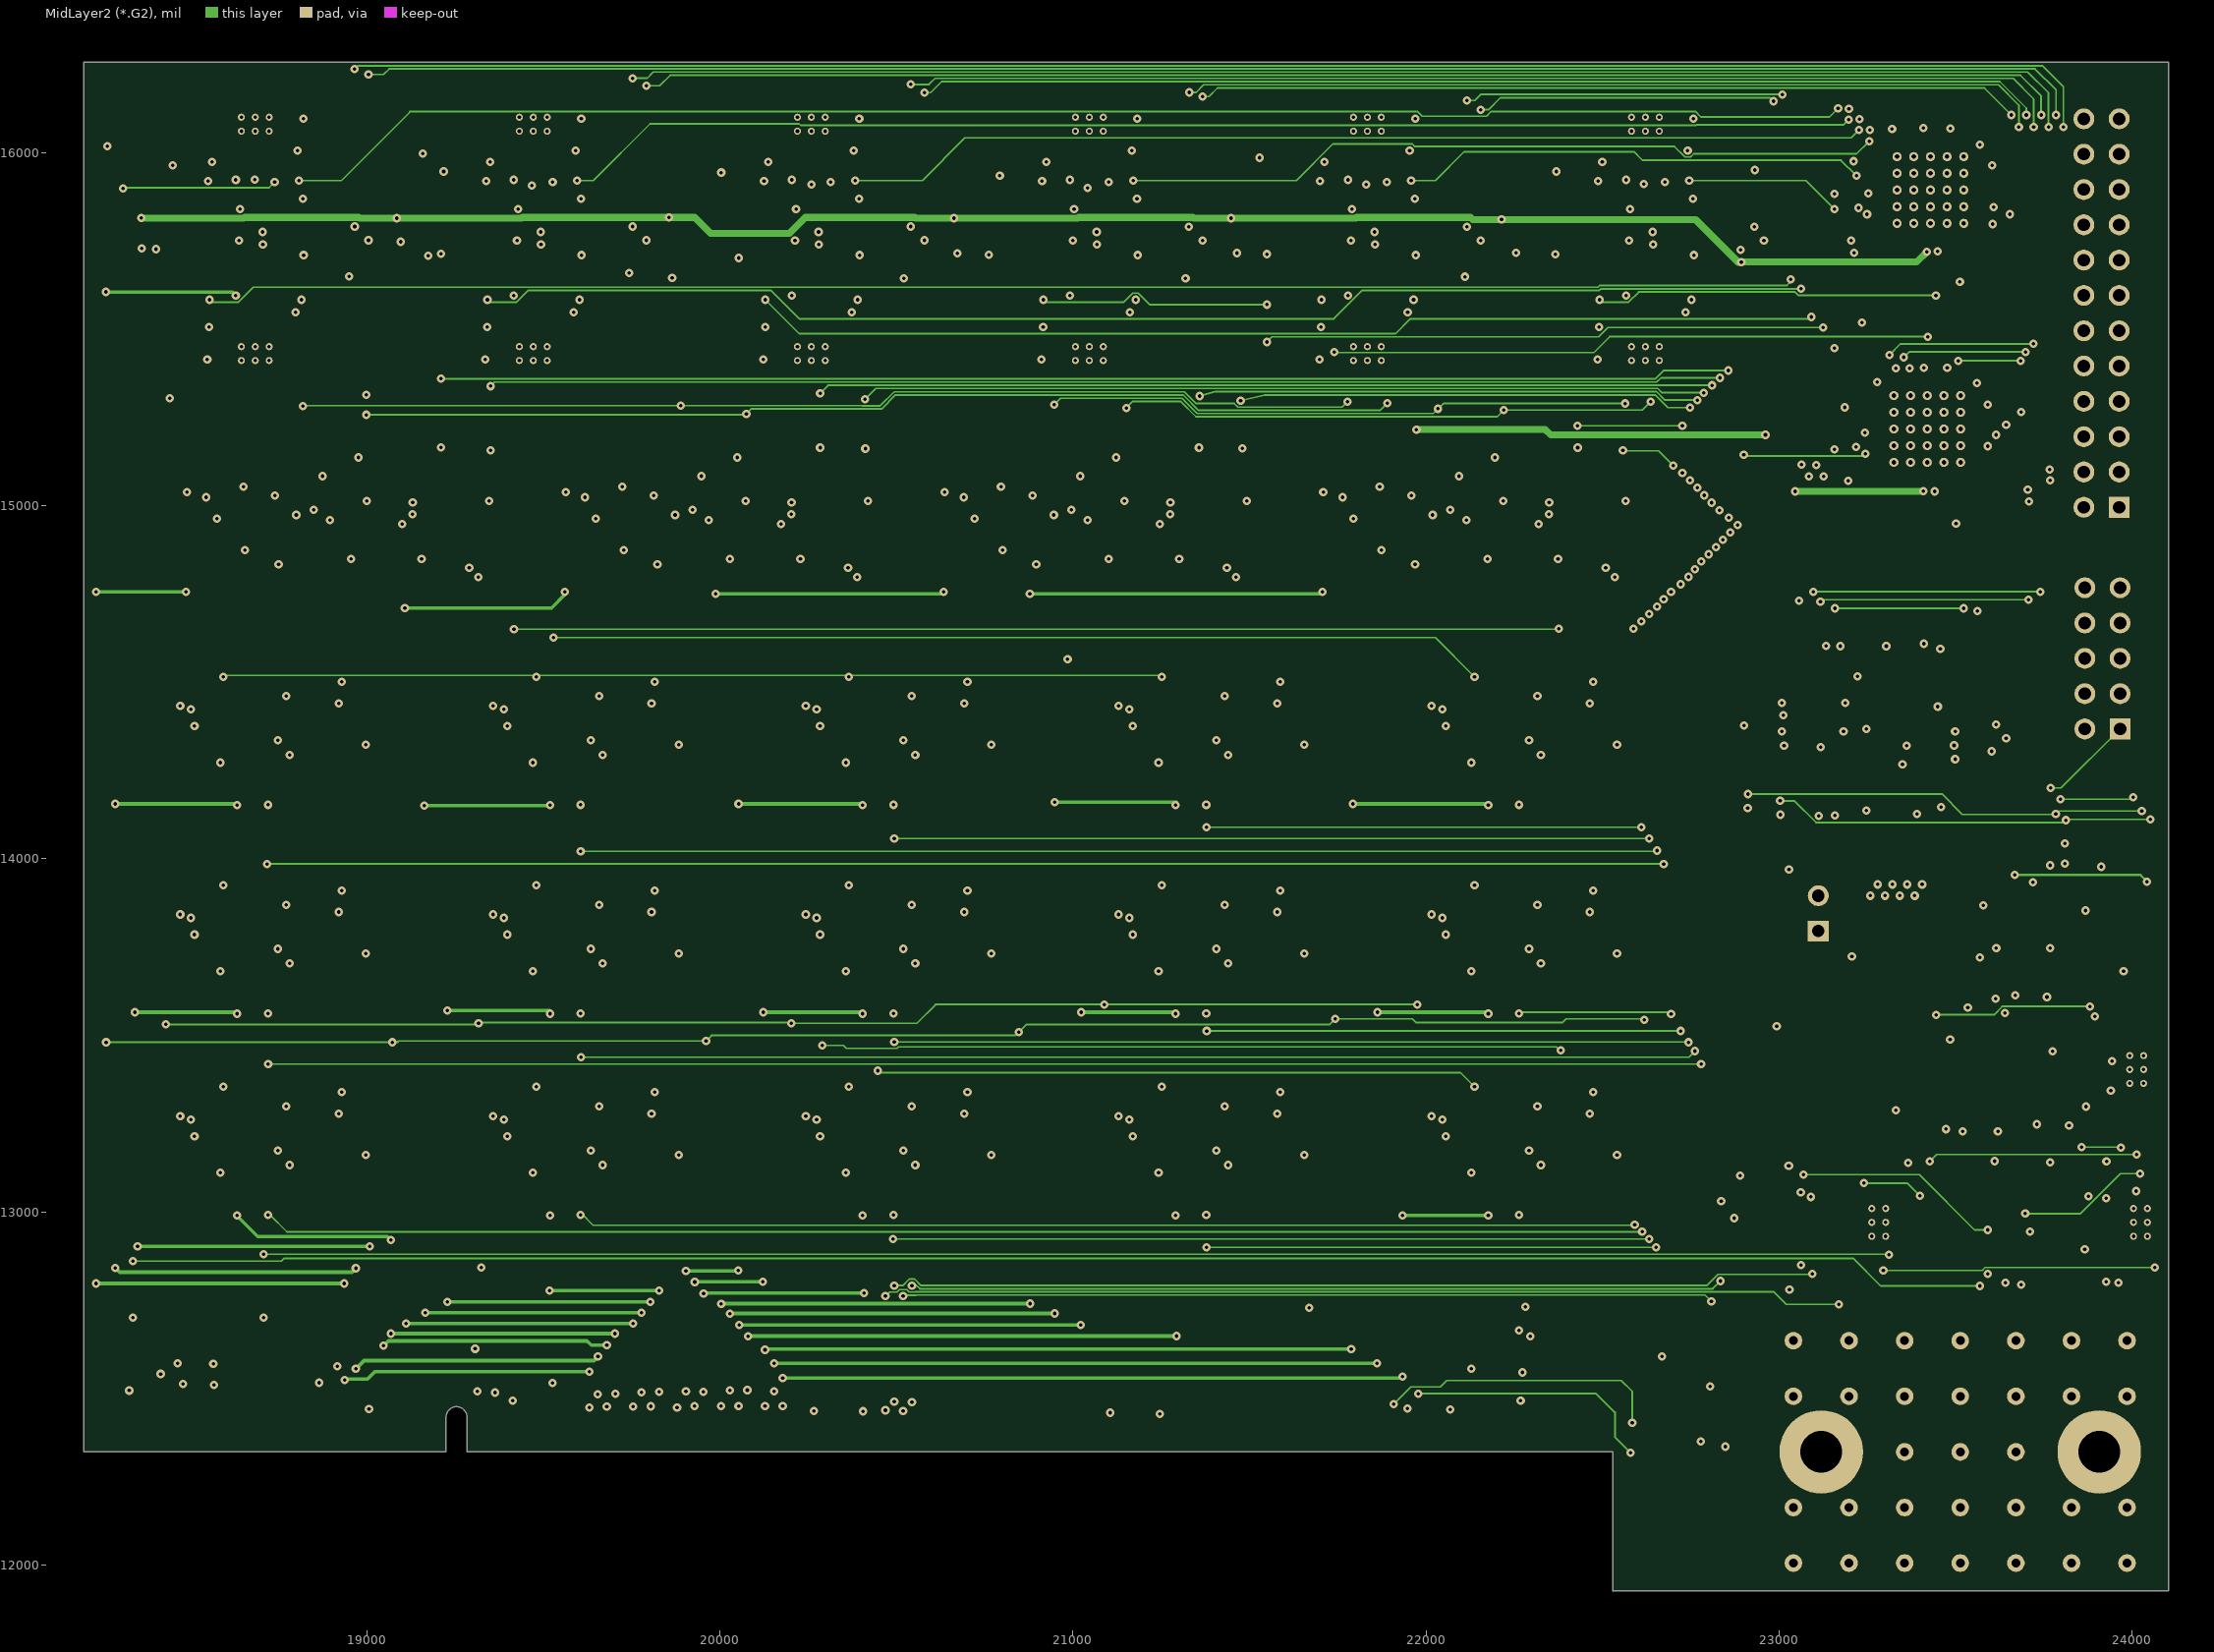
[diagram p8: MidLayer2 (*.G2)]
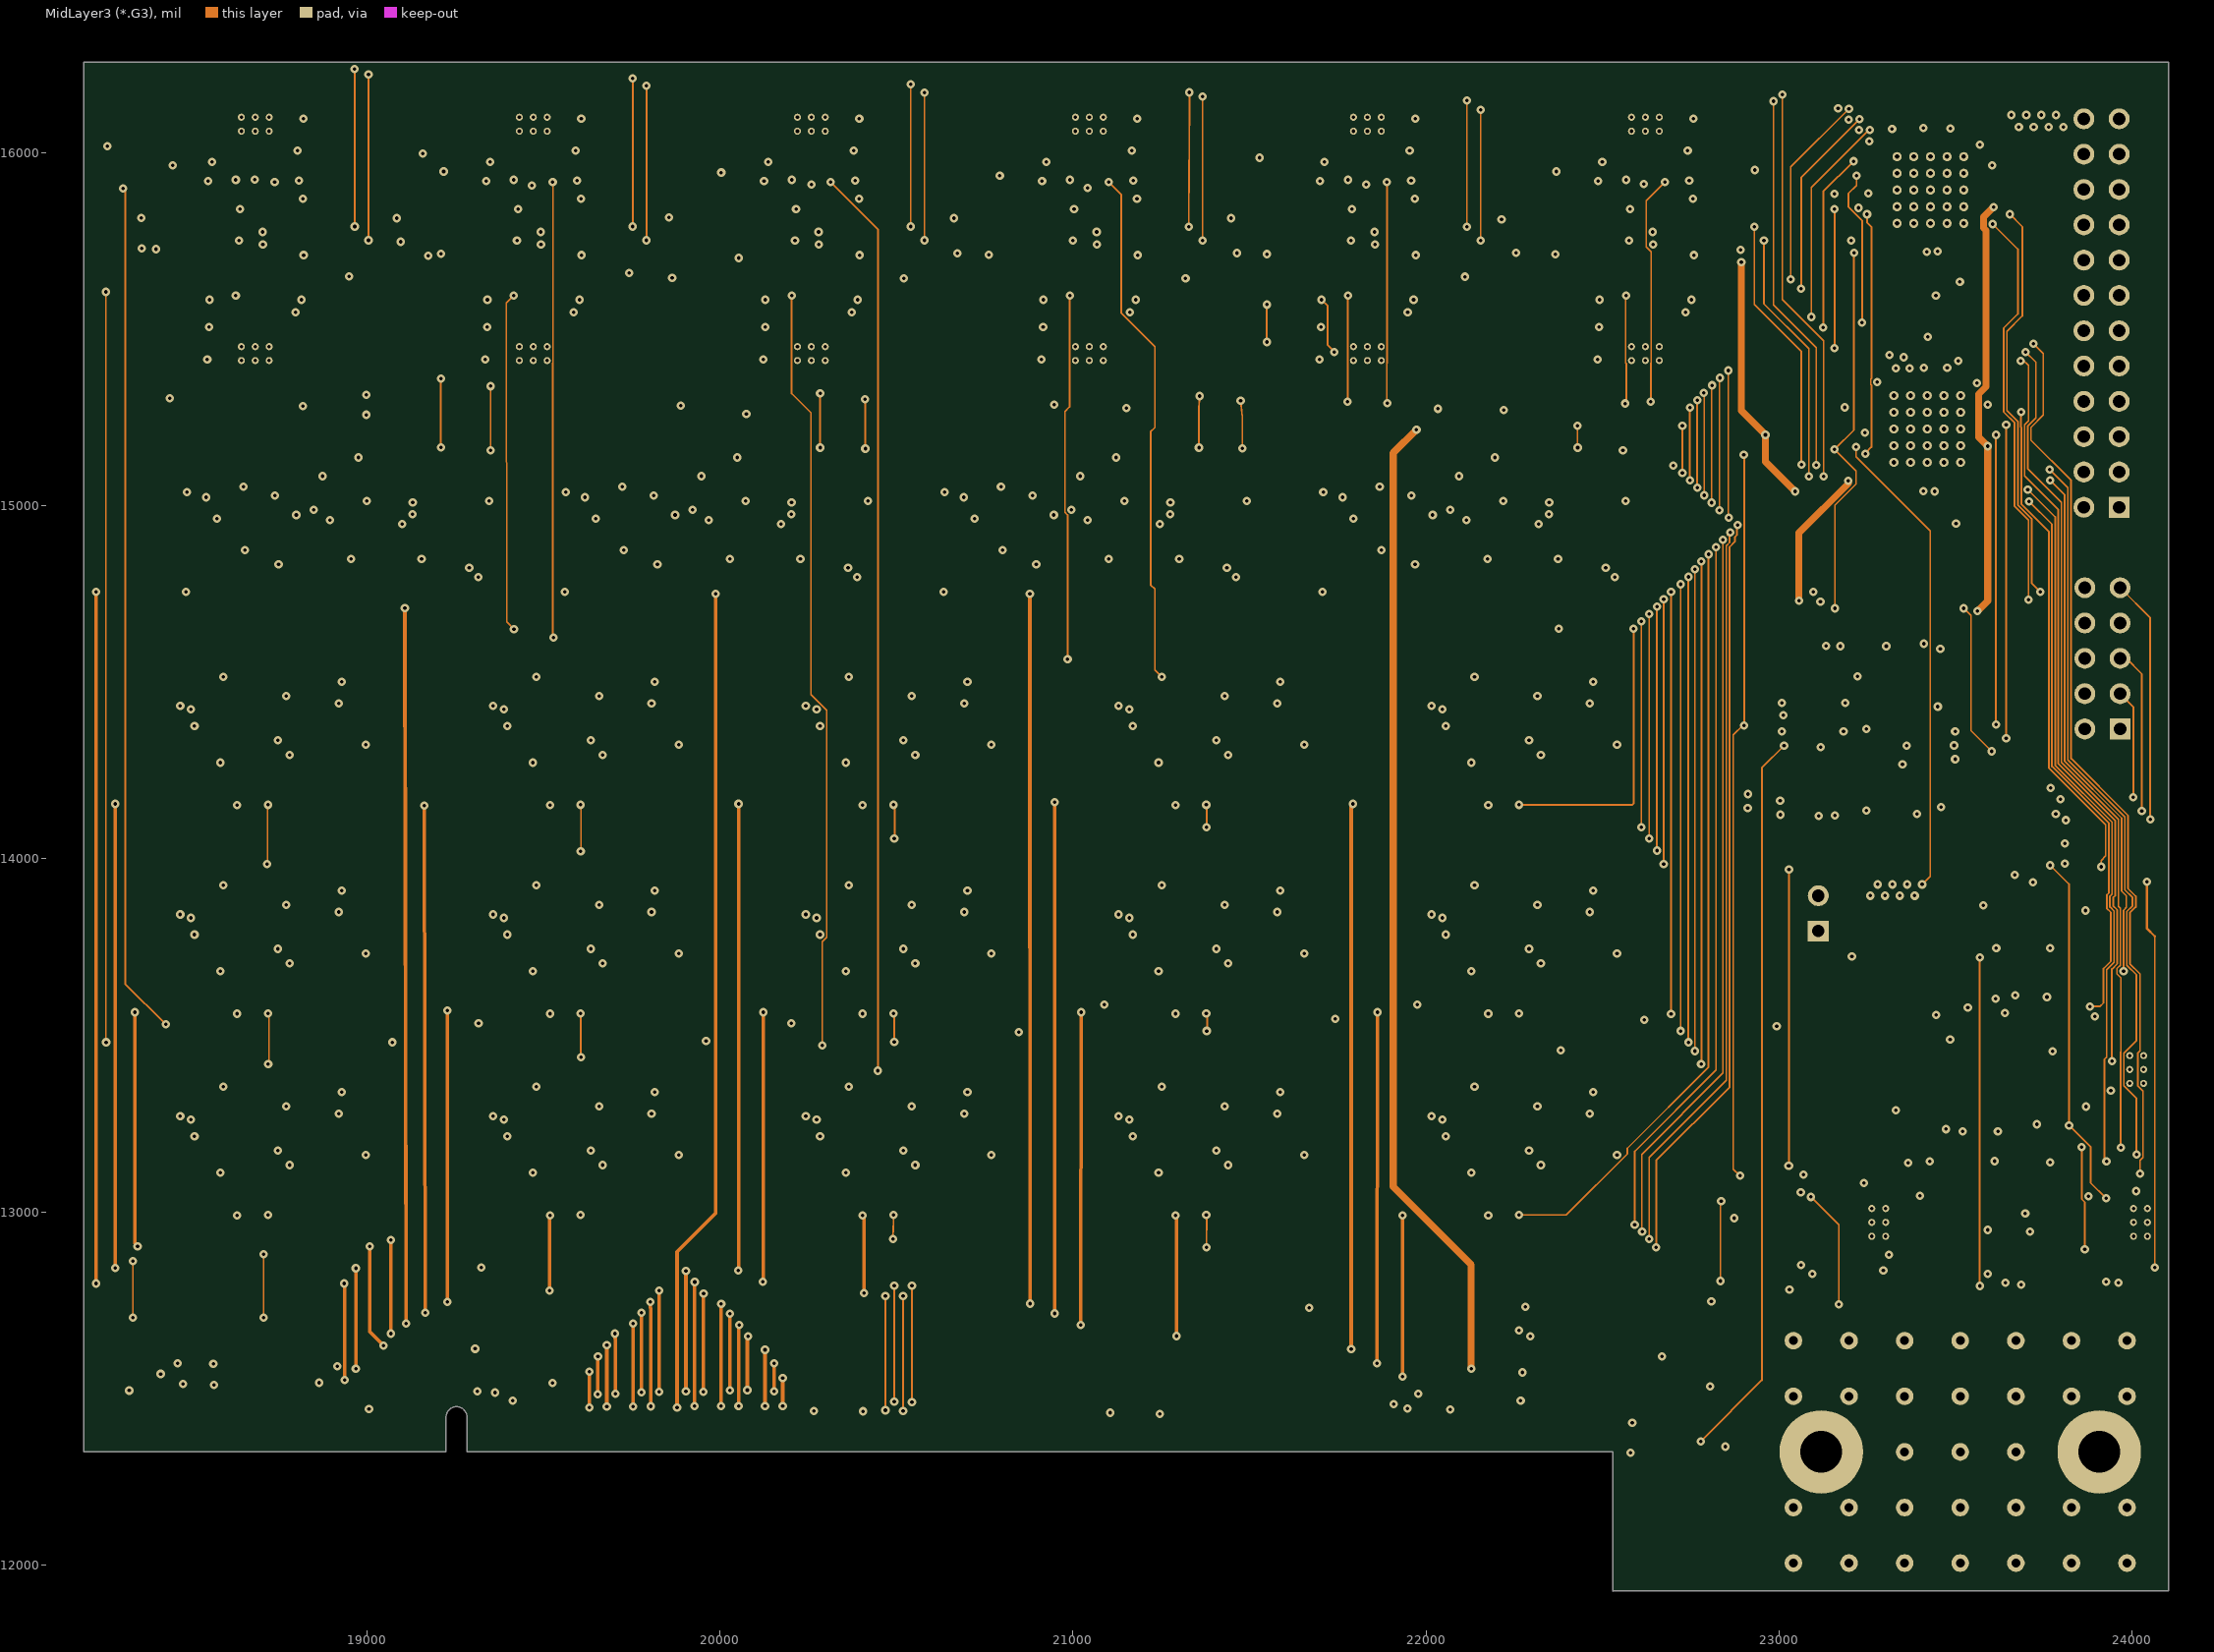
[diagram p9: MidLayer3 (*.G3)]

## Layer stack, top to bottom
Top Layer (.GTL): signal copper 1.4
Dielectric: prepreg 5, FR-4, Dk 4.8
MidLayer1 (*.G1): signal copper 1.4
Dielectric: core 5, FR-4, Dk 4.8
+12V (*.GP1): plane copper 2.8, net (Multiple Nets)
Dielectric: prepreg 5, FR-4, Dk 4.8
-12V (*.GP2): plane copper 2.8, net (Multiple Nets)
Dielectric: core 5, FR-4, Dk 4.8
A & GND (*.GP3): plane copper 2.8, net (Multiple Nets)
Dielectric: prepreg 5, FR-4, Dk 4.8
Chassis E (*.GP4): plane copper 2.8, net (Multiple Nets)
Dielectric: core 5, FR-4, Dk 4.8
+28V & VCC (*.GP5): plane copper 1.4, net (Multiple Nets)
Dielectric: prepreg 5, FR-4, Dk 4.8
MidLayer2 (*.G2): signal copper 1.4
Dielectric: core 5, FR-4, Dk 4.8
MidLayer3 (*.G3): signal copper 1.4
Dielectric: prepreg 5, FR-4, Dk 4.8
Bottom Layer (.GBL): signal copper 1.4

## Board outline
18198,12320 18198,16256.2 24103.51,16256.2 24103.51,11926.3 22528.71,11926.3 22528.71,11925.49 22528.71,12320 19284.61,12320 19283.81,12320.81 19283.81,12418.43 ccw(c19254.28,12418.43) 19224.75,12418.43 19224.75,12320

## Design rules (kind name [scope] priority, off if disabled: settings)
Clearance "MSOP pad spacing" [(HasFootprint('TQFP48_m') or HasFootprint('RM-8'))] p1: gap=6
Clearance [All] p2: gap=4
ComponentClearance ComponentClearance_1 [(InComponent('J1'))] p1: gap=0 collisioncheckmode=3 verticalgap=10 showdistances=FALSE
ComponentClearance "J1 clearance" [(HasFootprint('QMS EDGE PWR PINS'))] p2: gap=-393.7 collisioncheckmode=3 verticalgap=0 showdistances=FALSE
ComponentClearance [All] p3: gap=5 collisioncheckmode=3 verticalgap=10 showdistances=TRUE
FabricationTestPointUsage TestPointUsage [All] p1: valid=0 allowmultiple=FALSE
FabricationTestpoint Testpoint [(IsPad And (OnTopLayer Or OnBottomLayer))] p1: side=3 testpointundercomponent=TRUE minsize=40 maxsize=100 preferedsize=60 minholesize=20 maxholesize=40 preferedholesize=32 testpointgrid=1 allowsidetop=TRUE allowsidebottom=TRUE usegrid=TRUE gridtolerance=0.01
HoleSize [All] p1: absolutevalues=TRUE maxlimit=300 minlimit=1 maxpercent=80.000 minpercent=20.000
NetsToIgnore [InNet('E') And OnLayer('Chassis E')] p1:
PlaneClearance [All] p1: clearance=10
PlaneConnect PlaneConnect_1 [(InComponent('Q1*'))or(InComponent('Q2*')) Or (InComponent('U13')) or (InComponent('U16'))or(InComponent('Q3')) or(InComponent('Q4'))or(InComponent('Q5'))or (InNet(E))] p1: planeconnectstyle=Direct reliefexpansion=20 reliefentries=4 reliefconductorwidth=10 reliefairgap=10
PlaneConnect [All] p2: planeconnectstyle=Relief reliefexpansion=20 reliefentries=4 reliefconductorwidth=10 reliefairgap=10
PolygonConnect [All] p1: connectstyle=Relief reliefconductorwidth=10 reliefentries=4 polygonreliefangle="90 Angle"
RoomDefinition "CPLD board" [InComponentClass('CPLD board')] p1: confinementstyle=ConfineIn formatcopy=TRUE lockcomponents=FALSE outline 18024,11923 24499.73,11923 24499.73,16093.49 18024,16093.49
RoomDefinition Analog [InComponentClass('Analog')] p2: confinementstyle=ConfineIn formatcopy=TRUE lockcomponents=FALSE outline 23161.73,14881.49 24022.73,14881.49 24022.73,16251.49 23161.73,16251.49
RoomDefinition "Bias Voltages" [InComponentClass('Bias Voltages')] p3: confinementstyle=ConfineIn formatcopy=TRUE lockcomponents=FALSE outline 18262.46,12593 18262.46,12677 18398.16,12677 18398.16,12695.11 22908.64,12695.11 22908.64,13178.31 23303,13178.31 23303,13364 23328,13364 23328,13532.5 23471.15,13532.5 23471.15,13552.44 23540,13552.44 23540,13808 23568.69,13808 23568.69,13929.61 23790,13929.61 23790,13968 23944,13968 23944,13908 23946,13908 23946,13854.5 24039,13854.5 24039,13543.66 24065.83,13543.66 24065.83,13110.75 24076.59,13110.75 24076.59,12829.09 23993.21,12829.09 23993.21,12817.92 23854.71,12817.92 23854.71,12747.92 23854.71,12380.9 19006.7,12380.9 18768.16,12380.9 18768.16,12385.9 18398.16,12385.9 18398.16,12418.51 18263.47,12418.51 18263.47,12593
RoomDefinition P3A [InComponentClass('P3A')] p4: confinementstyle=ConfineIn formatcopy=FALSE lockcomponents=FALSE outline 18394.85,14731.42 19438.16,14731.42 19438.16,15203.8 18394.85,15203.8
RoomDefinition SerialPhase7 [InComponentClass('SerialPhase7')] p5: confinementstyle=ConfineIn formatcopy=TRUE lockcomponents=TRUE outline 19280.68,13550.31 19999.18,13550.31 19999.18,14022.75 19280.68,14022.75
RoomDefinition SerialPhase11 [InComponentClass('SerialPhase11')] p6: confinementstyle=ConfineIn formatcopy=TRUE lockcomponents=TRUE outline 18394.85,12979.45 19113.35,12979.45 19113.35,13451.89 18394.85,13451.89
RoomDefinition SerialPhase6 [InComponentClass('SerialPhase6')] p7: confinementstyle=ConfineIn formatcopy=TRUE lockcomponents=TRUE outline 18394.85,13550.31 19113.35,13550.31 19113.35,14022.75 18394.85,14022.75
RoomDefinition RefAmps3 [InComponentClass('RefAmps3')] p8: confinementstyle=ConfineIn formatcopy=FALSE lockcomponents=FALSE outline 19877.73,15376.49 20488.73,15376.49 20488.73,16133.49 19877.73,16133.49
RoomDefinition TGA [InComponentClass('TGA')] p9: confinementstyle=ConfineIn formatcopy=TRUE lockcomponents=TRUE outline 20540.52,14731.42 21583.83,14731.42 21583.83,15203.8 20540.52,15203.8
RoomDefinition TGB [InComponentClass('TGB')] p10: confinementstyle=ConfineIn formatcopy=TRUE lockcomponents=TRUE outline 21613.35,14731.42 22656.66,14731.42 22656.66,15203.8 21613.35,15203.8
RoomDefinition P3B [InComponentClass('P3B')] p11: confinementstyle=ConfineIn formatcopy=FALSE lockcomponents=TRUE outline 19467.69,14731.42 20510.99,14731.42 20510.99,15203.8 19467.69,15203.8
RoomDefinition "Reset Gate" [InComponentClass('Reset Gate')] p12: confinementstyle=ConfineIn formatcopy=TRUE lockcomponents=FALSE outline 21938.16,14140.87 22656.66,14140.87 22656.66,14613.31 21938.16,14613.31
RoomDefinition PPhase1/22 [InComponentClass('PPhase1/22')] p13: confinementstyle=ConfineIn formatcopy=TRUE lockcomponents=FALSE outline 19280.68,14140.87 19999.18,14140.87 19999.18,14613.31 19280.68,14613.31
RoomDefinition SerialPhase14 [InComponentClass('SerialPhase14')] p14: confinementstyle=ConfineIn formatcopy=TRUE lockcomponents=FALSE outline 21052.33,12979.45 21770.83,12979.45 21770.83,13451.89 21052.33,13451.89
RoomDefinition SerialPhase8 [InComponentClass('SerialPhase8')] p15: confinementstyle=ConfineIn formatcopy=TRUE lockcomponents=FALSE outline 20166.5,13550.31 20885.01,13550.31 20885.01,14022.75 20166.5,14022.75
RoomDefinition "Summing Gate" [InComponentClass('Summing Gate')] p16: confinementstyle=ConfineIn formatcopy=TRUE lockcomponents=FALSE outline 21938.16,12979.45 22656.66,12979.45 22656.66,13451.89 21938.16,13451.89
RoomDefinition SerialPhase13 [InComponentClass('SerialPhase13')] p17: confinementstyle=ConfineIn formatcopy=TRUE lockcomponents=FALSE outline 20166.5,12979.45 20885.01,12979.45 20885.01,13451.89 20166.5,13451.89
RoomDefinition SerialPhase12 [InComponentClass('SerialPhase12')] p18: confinementstyle=ConfineIn formatcopy=TRUE lockcomponents=FALSE outline 19280.68,12979.45 19999.18,12979.45 19999.18,13451.89 19280.68,13451.89
RoomDefinition SerialPhase10 [InComponentClass('SerialPhase10')] p19: confinementstyle=ConfineIn formatcopy=TRUE lockcomponents=FALSE outline 21938.16,13550.31 22656.66,13550.31 22656.66,14022.75 21938.16,14022.75
RoomDefinition SerialPhase9 [InComponentClass('SerialPhase9')] p20: confinementstyle=ConfineIn formatcopy=TRUE lockcomponents=FALSE outline 21052.33,13550.31 21770.83,13550.31 21770.83,14022.75 21052.33,14022.75
RoomDefinition PPhase1/24 [InComponentClass('PPhase1/24')] p21: confinementstyle=ConfineIn formatcopy=TRUE lockcomponents=FALSE outline 21052.33,14140.87 21770.83,14140.87 21770.83,14613.31 21052.33,14613.31
RoomDefinition PPhase1/23 [InComponentClass('PPhase1/23')] p22: confinementstyle=ConfineIn formatcopy=TRUE lockcomponents=FALSE outline 20166.5,14140.87 20885.01,14140.87 20885.01,14613.31 20166.5,14613.31
RoomDefinition PPhase1/21 [InComponentClass('PPhase1/21')] p23: confinementstyle=ConfineIn formatcopy=TRUE lockcomponents=TRUE outline 18394.85,14140.87 19113.35,14140.87 19113.35,14613.31 18394.85,14613.31
RoomDefinition RefAmps4 [InComponentClass('RefAmps4')] p24: confinementstyle=ConfineIn formatcopy=TRUE lockcomponents=FALSE outline 20665.73,15376.49 21275.73,15376.49 21275.73,16133.49 20665.73,16133.49
RoomDefinition RefAmps1 [InComponentClass('RefAmps1')] p25: confinementstyle=ConfineIn formatcopy=FALSE lockcomponents=FALSE outline 18238.73,15376.49 18913.73,15376.49 18913.73,16133.49 18238.73,16133.49
RoomDefinition RefAmps5 [InComponentClass('RefAmps5')] p26: confinementstyle=ConfineIn formatcopy=TRUE lockcomponents=FALSE outline 21452.73,15376.49 22063.73,15376.49 22063.73,16133.49 21452.73,16133.49
RoomDefinition RefAmps2 [InComponentClass('RefAmps2')] p27: confinementstyle=ConfineIn formatcopy=FALSE lockcomponents=FALSE outline 19090.73,15376.49 19700.73,15376.49 19700.73,16133.49 19090.73,16133.49
RoomDefinition RefAmps6 [InComponentClass('RefAmps6')] p28: confinementstyle=ConfineIn formatcopy=TRUE lockcomponents=FALSE outline 22239.73,15376.49 22850.73,15376.49 22850.73,16133.49 22239.73,16133.49
RoutingVias [All] p1: holewidth=10 width=24 viastyle="Through Hole" minholewidth=10 minwidth=24 maxholewidth=10 maxwidth=24
SilkscreenOverComponentPads [All] p1: minsilkscreentomaskgap=10
SolderMaskExpansion [All] p1: expansion=2
Width Width_1 [All] p1: maxlimit=50 minlimit=5 preferedwidth=5
Width [All] p2: maxlimit=50 minlimit=5 preferedwidth=10
Width "Analog power" [(InNet('-5ANA') OR InNet('+5ANA') OR InNet(A)or InNet('+24V'))] p3: maxlimit=15 minlimit=15 preferedwidth=15
Width "+5V/DGND trace" [(InNet('+5') OR InNet('D'))] p4: maxlimit=50 minlimit=10 preferedwidth=50 midlayer1_minwidth=50 midlayer2_minwidth=50 midlayer3_minwidth=50 bottomlayer_minwidth=50 minimp=50.000000 maximp=50.000000 favimp=50.000000
21 further rules are at their usual default settings.

## Classes and differential pairs
component class SerialPhase14: C1N C2N C3N C4N L1N L2N R1N R2N TP3N U1N U2N U3N
component class SerialPhase13: C1M C2M C3M C4M L1M L2M R1M R2M TP3M U1M U2M U3M
component class SerialPhase8: C1H C2H C3H C4H L1H L2H R1H R2H TP3H U1H U2H U3H
component class PPhase1/22: C1B C2B C3B C4B L1B L2B R1B R2B TP3B U1B U2B U3B
component class Analog: C33 C34 C35 C36 P3 U13 U16
component class "Bias Voltages": C22 C25 C27 C28 C29 C30 C38 C39 C40 C41 C42 C43 C45 C46 C47 Q3 Q4 Q5 R15 R16 R18 R19 R21 R22 R24 R25 R26 R27 R28 R29 R30 R31 R32 R33 R34 R35 R36 R37 R38 R39 R40 R41 R42 R43 R44 R45 R46 R47 R48 TP5 TP6 TP7 TP8 TP9 TP10 U11 U12 U14 U15 U17 U18
component class "CPLD board": C7 C12 C16 C17 C18 C19 C20 C21 C23 C24 C26 C31 C32 C53 C54 C55 C56 C57 C58 C59 J1 L5 P1 P2 Q6 R11 RN1 TP11 TP12 TP13 TP14 TP15 TP16 TP17 TP18 TP19 TP20 TP21 U9 U10 U19
component class P3A: C5A C6A C8A C37A D1A D2A L3A L4A R3A R4A R5A R6A TP4A U4A U5A U6A U7A
component class P3B: C5B C6B C8B C37B D1B D2B L3B L4B R3B R4B R5B R6B TP4B U4B U5B U6B U7B
component class PPhase1/21: C1A C2A C3A C4A L1A L2A R1A R2A TP3A U1A U2A U3A
component class RefAmps1: C9A C10A C11A C13A C14A C15A C44A Q1A Q2A R7A R8A R9A R10A R12A R13A R14A R17A R20A R23A TP1A TP2A U8A U20A
component class RefAmps2: C9B C10B C11B C13B C14B C15B C44B Q1B Q2B R7B R8B R9B R10B R12B R13B R14B R17B R20B R23B TP1B TP2B U8B U20B
component class RefAmps3: C9C C10C C11C C13C C14C C15C C44C Q1C Q2C R7C R8C R9C R10C R12C R13C R14C R17C R20C R23C TP1C TP2C U8C U20C
component class RefAmps4: C9D C10D C11D C13D C14D C15D C44D Q1D Q2D R7D R8D R9D R10D R12D R13D R14D R17D R20D R23D TP1D TP2D U8D U20D
component class RefAmps5: C9E C10E C11E C13E C14E C15E C44E Q1E Q2E R7E R8E R9E R10E R12E R13E R14E R17E R20E R23E TP1E TP2E U8E U20E
component class RefAmps6: C9F C10F C11F C13F C14F C15F C44F Q1F Q2F R7F R8F R9F R10F R12F R13F R14F R17F R20F R23F TP1F TP2F U8F U20F
component class "Reset Gate": C1E C2E C3E C4E L1E L2E R1E R2E TP3E U1E U2E U3E
component class PPhase1/23: C1C C2C C3C C4C L1C L2C R1C R2C TP3C U1C U2C U3C
component class PPhase1/24: C1D C2D C3D C4D L1D L2D R1D R2D TP3D U1D U2D U3D
component class SerialPhase9: C1I C2I C3I C4I L1I L2I R1I R2I TP3I U1I U2I U3I
component class SerialPhase10: C1J C2J C3J C4J L1J L2J R1J R2J TP3J U1J U2J U3J
component class SerialPhase11: C1K C2K C3K C4K L1K L2K R1K R2K TP3K U1K U2K U3K
component class SerialPhase12: C1L C2L C3L C4L L1L L2L R1L R2L TP3L U1L U2L U3L
component class SerialPhase7: C1G C2G C3G C4G L1G L2G R1G R2G TP3G U1G U2G U3G
component class SerialPhase6: C1F C2F C3F C4F L1F L2F R1F R2F TP3F U1F U2F U3F
component class "Summing Gate": C1O C2O C3O C4O L1O L2O R1O R2O TP3O U1O U2O U3O
component class TGA: C5C C6C C8C C37C D1C D2C L3C L4C R3C R4C R5C R6C TP4C U4C U5C U6C U7C
component class TGB: C5D C6D C8D C37D D1D D2D L3D L4D R3D R4D R5D R6D TP4D U4D U5D U6D U7D
net class CDO[19..1]: CDO1 CDO2 CDO3 CDO4 CDO5 CDO6 CDO7 CDO8 CDO9 CDO10 CDO11 CDO12 CDO13 CDO14 CDO15 CDO16 CDO17 CDO18 CDO19
net class DAC_HI[6..1]: DAC_HI1 DAC_HI2 DAC_HI3 DAC_HI4 DAC_HI5 DAC_HI6
net class DAC_LO[6..1]: DAC_LO1 DAC_LO2 DAC_LO3 DAC_LO4 DAC_LO5 DAC_LO6
net class MON_HI[1..6]: MON_HI1 MON_HI2 MON_HI3 MON_HI4 MON_HI5 MON_HI6
net class MON_LO[1..6]: MON_LO1 MON_LO2 MON_LO3 MON_LO4 MON_LO5 MON_LO6
net class PH_CLK[23..1]: PH_CLK1 PH_CLK2 PH_CLK3 PH_CLK4 PH_CLK5 PH_CLK6 PH_CLK7 PH_CLK8 PH_CLK9 PH_CLK10 PH_CLK11 PH_CLK12 PH_CLK13 PH_CLK14 PH_CLK15 PH_CLK16 PH_CLK17 PH_CLK18 PH_CLK19 PH_CLK20 PH_CLK21 PH_CLK22 PH_CLK23
net class VREFHI[6..1]: VREFHI1 VREFHI2 VREFHI3 VREFHI4 VREFHI5 VREFHI6
net class VREFLO[6..1]: VREFLO1 VREFLO2 VREFLO3 VREFLO4 VREFLO5 VREFLO6
channel class Sinistro_Clk_31B: RefAmps1 RefAmps2 RefAmps3 RefAmps4 RefAmps5 RefAmps6
channel class Sinistro_Clk_32B: PPhase1/21 PPhase1/22 PPhase1/23 PPhase1/24 "Reset Gate" SerialPhase6 SerialPhase7 SerialPhase8 SerialPhase9 SerialPhase10 SerialPhase11 SerialPhase12 SerialPhase13 SerialPhase14 "Summing Gate"
channel class Sinistro_Clk_33B: P3A P3B TGA TGB

## Components (designator, comment, footprint, x,y, rotation, side; value= is the part's Value field where it differs from the comment)
C1A "35V" SMD_CAP_7343 18507.37,14375.39 r270 bottom (schematic designator C1)
C1B "35V" SMD_CAP_7343 19393.2,14375.39 r270 bottom (schematic designator C1)
C1C "35V" SMD_CAP_7343 20279.02,14375.39 r270 bottom (schematic designator C1)
C1D "35V" SMD_CAP_7343 21164.85,14375.39 r270 bottom (schematic designator C1)
C1E "35V" SMD_CAP_7343 22050.68,14375.39 r270 bottom (schematic designator C1)
C1F "35V" SMD_CAP_7343 18507.37,13784.84 r270 bottom (schematic designator C1)
C1G "35V" SMD_CAP_7343 19393.2,13784.84 r270 bottom (schematic designator C1)
C1H "35V" SMD_CAP_7343 20279.02,13784.84 r270 bottom (schematic designator C1)
C1I "35V" SMD_CAP_7343 21164.85,13784.84 r270 bottom (schematic designator C1)
C1J "35V" SMD_CAP_7343 22050.68,13784.84 r270 bottom (schematic designator C1)
C1K "35V" SMD_CAP_7343 18507.37,13213.98 r270 bottom (schematic designator C1)
C1L "35V" SMD_CAP_7343 19393.2,13213.98 r270 bottom (schematic designator C1)
C1M "35V" SMD_CAP_7343 20279.02,13213.98 r270 bottom (schematic designator C1)
C1N "35V" SMD_CAP_7343 21164.85,13213.98 r270 bottom (schematic designator C1)
C1O "35V" SMD_CAP_7343 22050.68,13213.98 r270 bottom (schematic designator C1)
C2A "Cap SMD" SMD_0805 18714.06,14473.82 r90 top (schematic designator C2)
C2B "Cap SMD" SMD_0805 19599.89,14473.82 r90 top (schematic designator C2)
C2C "Cap SMD" SMD_0805 20485.72,14473.82 r90 top (schematic designator C2)
C2D "Cap SMD" SMD_0805 21371.54,14473.82 r90 top (schematic designator C2)
C2E "Cap SMD" SMD_0805 22257.37,14473.82 r90 top (schematic designator C2)
C2F "Cap SMD" SMD_0805 18714.06,13883.27 r90 top (schematic designator C2)
C2G "Cap SMD" SMD_0805 19599.89,13883.27 r90 top (schematic designator C2)
C2H "Cap SMD" SMD_0805 20485.72,13883.27 r90 top (schematic designator C2)
C2I "Cap SMD" SMD_0805 21371.54,13883.27 r90 top (schematic designator C2)
C2J "Cap SMD" SMD_0805 22257.37,13883.27 r90 top (schematic designator C2)
C2K "Cap SMD" SMD_0805 18714.06,13312.4 r90 top (schematic designator C2)
C2L "Cap SMD" SMD_0805 19599.89,13312.4 r90 top (schematic designator C2)
C2M "Cap SMD" SMD_0805 20485.72,13312.4 r90 top (schematic designator C2)
C2N "Cap SMD" SMD_0805 21371.54,13312.4 r90 top (schematic designator C2)
C2O "Cap SMD" SMD_0805 22257.37,13312.4 r90 top (schematic designator C2)
C3A "35V" SMD_CAP_7343 18999.5,14375.39 r90 bottom (schematic designator C3)
C3B "35V" SMD_CAP_7343 19885.32,14375.39 r90 bottom (schematic designator C3)
C3C "35V" SMD_CAP_7343 20771.15,14375.39 r90 bottom (schematic designator C3)
C3D "35V" SMD_CAP_7343 21656.98,14375.39 r90 bottom (schematic designator C3)
C3E "35V" SMD_CAP_7343 22542.8,14375.39 r90 bottom (schematic designator C3)
C3F "35V" SMD_CAP_7343 18999.5,13784.84 r90 bottom (schematic designator C3)
C3G "35V" SMD_CAP_7343 19885.32,13784.84 r90 bottom (schematic designator C3)
C3H "35V" SMD_CAP_7343 20771.15,13784.84 r90 bottom (schematic designator C3)
C3I "35V" SMD_CAP_7343 21656.98,13784.84 r90 bottom (schematic designator C3)
C3J "35V" SMD_CAP_7343 22542.8,13784.84 r90 bottom (schematic designator C3)
C3K "35V" SMD_CAP_7343 18999.5,13213.98 r90 bottom (schematic designator C3)
C3L "35V" SMD_CAP_7343 19885.32,13213.98 r90 bottom (schematic designator C3)
C3M "35V" SMD_CAP_7343 20771.15,13213.98 r90 bottom (schematic designator C3)
C3N "35V" SMD_CAP_7343 21656.98,13213.98 r90 bottom (schematic designator C3)
C3O "35V" SMD_CAP_7343 22542.8,13213.98 r90 bottom (schematic designator C3)
C4A "Cap SMD" SMD_0805 18635.32,14473.82 r90 top (schematic designator C4)
C4B "Cap SMD" SMD_0805 19521.15,14473.82 r90 top (schematic designator C4)
C4C "Cap SMD" SMD_0805 20406.98,14473.82 r90 top (schematic designator C4)
C4D "Cap SMD" SMD_0805 21292.8,14473.82 r90 top (schematic designator C4)
C4E "Cap SMD" SMD_0805 22178.63,14473.82 r90 top (schematic designator C4)
C4F "Cap SMD" SMD_0805 18635.32,13883.27 r90 top (schematic designator C4)
C4G "Cap SMD" SMD_0805 19521.15,13883.27 r90 top (schematic designator C4)
C4H "Cap SMD" SMD_0805 20406.98,13883.27 r90 top (schematic designator C4)
C4I "Cap SMD" SMD_0805 21292.8,13883.27 r90 top (schematic designator C4)
C4J "Cap SMD" SMD_0805 22178.63,13883.27 r90 top (schematic designator C4)
C4K "Cap SMD" SMD_0805 18635.32,13312.4 r90 top (schematic designator C4)
C4L "Cap SMD" SMD_0805 19521.15,13312.4 r90 top (schematic designator C4)
C4M "Cap SMD" SMD_0805 20406.98,13312.4 r90 top (schematic designator C4)
C4N "Cap SMD" SMD_0805 21292.8,13312.4 r90 top (schematic designator C4)
C4O "Cap SMD" SMD_0805 22178.63,13312.4 r90 top (schematic designator C4)
C5A "35V" SMD_CAP_7343 19055.4,14973.31 r90 bottom (schematic designator C5)
C5B "35V" SMD_CAP_7343 20128.24,14973.31 r90 bottom (schematic designator C5)
C5C "35V" SMD_CAP_7343 21201.07,14973.31 r90 bottom (schematic designator C5)
C5D "35V" SMD_CAP_7343 22273.91,14973.31 r90 bottom (schematic designator C5)
C6A "Cap SMD" SMD_0805 18695.4,15073.31 r90 top (schematic designator C6)
C6B "Cap SMD" SMD_0805 19768.24,15073.31 r90 top (schematic designator C6)
C6C "Cap SMD" SMD_0805 20841.07,15073.31 r90 top (schematic designator C6)
C6D "Cap SMD" SMD_0805 21913.91,15073.31 r90 top (schematic designator C6)
C7 "15V" SMD_CAP_3216 22848,12450 r90 top
C8A "35V" SMD_CAP_7343 18555.4,14973.31 r90 bottom (schematic designator C8)
C8B "35V" SMD_CAP_7343 19628.24,14973.31 r90 bottom (schematic designator C8)
C8C "35V" SMD_CAP_7343 20701.07,14973.31 r90 bottom (schematic designator C8)
C8D "35V" SMD_CAP_7343 21773.91,14973.31 r90 bottom (schematic designator C8)
C9A "Cap SMD" SMD_0805 18871.31,16050.32 r270 bottom (schematic designator C9)
C9B "Cap SMD" SMD_0805 19658.71,16050.31 r270 bottom (schematic designator C9)
C9C "Cap SMD" SMD_0805 20446.11,16050.32 r270 bottom (schematic designator C9)
C9D "Cap SMD" SMD_0805 21233.51,16050.32 r270 bottom (schematic designator C9)
C9E "Cap SMD" SMD_0805 22020.91,16050.31 r270 bottom (schematic designator C9)
C9F "Cap SMD" SMD_0805 22808.31,16050.32 r270 bottom (schematic designator C9)
C10A "Cap SMD" SMD_0805 18498.7,15794.41 r270 bottom (schematic designator C10)
C10B "Cap SMD" SMD_0805 19286.11,15794.41 r270 bottom (schematic designator C10)
C10C "Cap SMD" SMD_0805 20073.51,15794.41 r270 bottom (schematic designator C10)
C10D "Cap SMD" SMD_0805 20860.91,15794.41 r270 bottom (schematic designator C10)
C10E "Cap SMD" SMD_0805 21648.31,15794.41 r270 bottom (schematic designator C10)
C10F "Cap SMD" SMD_0805 22435.71,15794.41 r270 bottom (schematic designator C10)
C11A "Cap SMD" SMD_0805 18497.29,15459.76 r270 bottom (schematic designator C11)
C11B "Cap SMD" SMD_0805 19284.69,15459.76 r270 bottom (schematic designator C11)
C11C "Cap SMD" SMD_0805 20072.09,15459.76 r270 bottom (schematic designator C11)
C11D "Cap SMD" SMD_0805 20859.5,15459.76 r270 bottom (schematic designator C11)
C11E "Cap SMD" SMD_0805 21646.9,15459.76 r270 bottom (schematic designator C11)
C11F "Cap SMD" SMD_0805 22434.3,15459.76 r270 bottom (schematic designator C11)
C12 "Cap SMD" SMD_0805 22713,12545 r0 top
C13A "15V" SMD_CAP_3216 18684.3,15961.73 r0 bottom (schematic designator C13)
C13B "15V" SMD_CAP_3216 19471.7,15961.73 r0 bottom (schematic designator C13)
C13C "15V" SMD_CAP_3216 20259.1,15961.73 r0 bottom (schematic designator C13)
C13D "15V" SMD_CAP_3216 21046.5,15961.73 r0 bottom (schematic designator C13)
C13E "15V" SMD_CAP_3216 21833.91,15961.73 r0 bottom (schematic designator C13)
C13F "15V" SMD_CAP_3216 22621.31,15961.73 r0 bottom (schematic designator C13)
C14A "15V" SMD_CAP_3216 18684.3,15548.35 r0 bottom (schematic designator C14)
C14B "15V" SMD_CAP_3216 19471.7,15548.35 r0 bottom (schematic designator C14)
C14C "15V" SMD_CAP_3216 20259.1,15548.35 r0 bottom (schematic designator C14)
C14D "15V" SMD_CAP_3216 21046.5,15548.35 r0 bottom (schematic designator C14)
C14E "15V" SMD_CAP_3216 21833.91,15548.35 r0 bottom (schematic designator C14)
C14F "15V" SMD_CAP_3216 22621.31,15548.35 r0 bottom (schematic designator C14)
C15A "Cap SMD" SMD_0805 18862.88,15705.83 r90 bottom (schematic designator C15)
C15B "Cap SMD" SMD_0805 19650.28,15705.83 r90 bottom (schematic designator C15)
C15C "Cap SMD" SMD_0805 20437.68,15705.83 r90 bottom (schematic designator C15)
C15D "Cap SMD" SMD_0805 21225.08,15705.83 r90 bottom (schematic designator C15)
C15E "Cap SMD" SMD_0805 22012.48,15705.83 r90 bottom (schematic designator C15)
C15F "Cap SMD" SMD_0805 22799.89,15705.83 r90 bottom (schematic designator C15)
C16 "Cap SMD" SMD_0805 22713,12480 r0 top
C17 "Cap SMD" SMD_0805 23907,14042.71 r0 top
C18 "Cap SMD" SMD_0805 23117.41,14225.63 r270 bottom
C19 "Cap SMD" SMD_0805 23097.41,14440.63 r180 bottom
C20 "Cap SMD" SMD_0805 23392.41,14220.63 r270 bottom
C21 "Cap SMD" SMD_0805 23407.41,14520.63 r90 bottom
C22 "Cap SMD" SMD_0805 23895.21,12894.92 r270 bottom
C23 "Cap SMD" SMD_0805 23177.41,14560.63 r180 bottom
C24 "Cap SMD" SMD_0805 23457.41,14235.63 r90 bottom
C25 "Cap SMD" SMD_0805 23692,13870 r180 bottom
C26 "Cap SMD" SMD_0805 23092.41,14360.63 r180 bottom
C27 "Cap SMD" SMD_0805 23687,13680 r180 bottom
C28 "Cap SMD" SMD_0805 23960.21,13044.92 r270 bottom
C29 "Cap SMD" SMD_0805 23430.21,12894.92 r90 bottom
C30 "Cap SMD" SMD_0805 23872,13810 r0 top
C31 "Cap SMD" SMD_0805 23407.41,14360.63 r0 bottom
C32 "15V" SMD_CAP_3216 23247.41,14250.63 r90 bottom
C33 "Cap SMD" SMD_0805 23464,15679 r180 bottom
C34 "Cap SMD" SMD_0805 23204,15839 r90 bottom
C35 "Cap SMD" SMD_0805 23455,14992.26 r180 bottom
C36 "Cap SMD" SMD_0805 23195,15162.26 r90 bottom
C37A "Cap SMD" SMD_0805 18925.4,15073.31 r90 top (schematic designator C37)
C37B "Cap SMD" SMD_0805 19998.24,15073.31 r90 top (schematic designator C37)
C37C "Cap SMD" SMD_0805 21071.07,15073.31 r90 top (schematic designator C37)
C37D "Cap SMD" SMD_0805 22143.91,15073.31 r90 top (schematic designator C37)
C38 "Cap SMD" SMD_0805 23061.31,12950 r90 bottom
C39 "Cap SMD" SMD_0805 23774.46,13432.84 r0 bottom
C40 "Cap SMD" SMD_0805 23594.46,13487.84 r180 bottom
C41 "Cap SMD" SMD_0805 18521.46,12630.51 r180 bottom
C42 "Cap SMD" SMD_0805 18296.46,12495.51 r270 top
C43 "Cap SMD" SMD_0805 18521.46,12450.51 r0 bottom
C44A "Cap SMD" SMD_0805 18405,15910 r0 top (schematic designator C44)
C44B "Cap SMD" SMD_0805 19173,15893 r0 top (schematic designator C44)
C44C "Cap SMD" SMD_0805 19960.4,15893 r0 top (schematic designator C44)
C44D "Cap SMD" SMD_0805 20747.8,15893 r0 top (schematic designator C44)
C44E "Cap SMD" SMD_0805 21535.2,15893 r0 top (schematic designator C44)
C44F "Cap SMD" SMD_0805 22322.61,15893 r0 top (schematic designator C44)
C45 "Cap SMD" SMD_0805 23702,13189 r0 top
C46 "Cap SMD" SMD_0805 23607,13173 r0 bottom
C47 "Cap SMD" SMD_0805 23380,13331 r180 top
C53 "15V" SMD_CAP_3216 22078,12590 r90 bottom
C54 "15V" SMD_CAP_3216 22198,12595 r90 bottom
C55 "15V" SMD_CAP_3216 19418,12605 r270 bottom
C56 "Cap SMD" SMD_0805 23009,13842 r90 top
C57 "15V" SMD_CAP_3216 22219,12729.37 r270 top
C58 "15V" SMD_CAP_3216 22091,12729.37 r270 top
C59 "35V" SMD_CAP_6032 19403,12806.37 r270 top
D1A "Diode BAS16" SOT-23 18745.4,14853.31 r0 top (schematic designator D1)
D1B "Diode BAS16" SOT-23 19818.24,14853.31 r0 top (schematic designator D1)
D1C "Diode BAS16" SOT-23 20891.07,14853.31 r0 top (schematic designator D1)
D1D "Diode BAS16" SOT-23 21963.91,14853.31 r0 top (schematic designator D1)
D2A "Diode BAS16" SOT-23 18895.4,14853.31 r0 top (schematic designator D2)
D2B "Diode BAS16" SOT-23 19968.24,14853.31 r0 top (schematic designator D2)
D2C "Diode BAS16" SOT-23 21041.07,14853.31 r0 top (schematic designator D2)
D2D "Diode BAS16" SOT-23 22113.91,14853.31 r0 top (schematic designator D2)
J1 "QMSS-EM-PC4" "QMS EDGE PWR PINS" 20757.06,12320 r90 top locked
L1A "Inductor" SMD_1210_INDUCT 18497.53,14375.39 r0 top (schematic designator L1)
L1B "Inductor" SMD_1210_INDUCT 19383.36,14375.39 r0 top (schematic designator L1)
L1C "Inductor" SMD_1210_INDUCT 20269.18,14375.39 r0 top (schematic designator L1)
L1D "Inductor" SMD_1210_INDUCT 21155.01,14375.39 r0 top (schematic designator L1)
L1E "Inductor" SMD_1210_INDUCT 22040.84,14375.39 r0 top (schematic designator L1)
L1F "Inductor" SMD_1210_INDUCT 18497.53,13784.84 r0 top (schematic designator L1)
L1G "Inductor" SMD_1210_INDUCT 19383.35,13784.84 r0 top (schematic designator L1)
L1H "Inductor" SMD_1210_INDUCT 20269.18,13784.84 r0 top (schematic designator L1)
L1I "Inductor" SMD_1210_INDUCT 21155.01,13784.84 r0 top (schematic designator L1)
L1J "Inductor" SMD_1210_INDUCT 22040.84,13784.84 r0 top (schematic designator L1)
L1K "Inductor" SMD_1210_INDUCT 18497.53,13213.98 r0 top (schematic designator L1)
L1L "Inductor" SMD_1210_INDUCT 19383.35,13213.98 r0 top (schematic designator L1)
L1M "Inductor" SMD_1210_INDUCT 20269.18,13213.98 r0 top (schematic designator L1)
L1N "Inductor" SMD_1210_INDUCT 21155.01,13213.98 r0 top (schematic designator L1)
L1O "Inductor" SMD_1210_INDUCT 22040.83,13213.98 r0 top (schematic designator L1)
L2A "Inductor" SMD_1210_INDUCT 19009.34,14375.39 r180 top (schematic designator L2)
L2B "Inductor" SMD_1210_INDUCT 19895.16,14375.39 r180 top (schematic designator L2)
L2C "Inductor" SMD_1210_INDUCT 20780.99,14375.39 r180 top (schematic designator L2)
L2D "Inductor" SMD_1210_INDUCT 21666.82,14375.39 r180 top (schematic designator L2)
L2E "Inductor" SMD_1210_INDUCT 22552.64,14375.39 r180 top (schematic designator L2)
L2F "Inductor" SMD_1210_INDUCT 19009.34,13784.84 r180 top (schematic designator L2)
L2G "Inductor" SMD_1210_INDUCT 19895.17,13784.84 r180 top (schematic designator L2)
L2H "Inductor" SMD_1210_INDUCT 20780.99,13784.84 r180 top (schematic designator L2)
L2I "Inductor" SMD_1210_INDUCT 21666.82,13784.84 r180 top (schematic designator L2)
L2J "Inductor" SMD_1210_INDUCT 22552.65,13784.84 r180 top (schematic designator L2)
L2K "Inductor" SMD_1210_INDUCT 19009.34,13213.98 r180 top (schematic designator L2)
L2L "Inductor" SMD_1210_INDUCT 19895.17,13213.98 r180 top (schematic designator L2)
L2M "Inductor" SMD_1210_INDUCT 20780.99,13213.98 r180 top (schematic designator L2)
L2N "Inductor" SMD_1210_INDUCT 21666.82,13213.98 r180 top (schematic designator L2)
L2O "Inductor" SMD_1210_INDUCT 22552.65,13213.98 r180 top (schematic designator L2)
L3A "Inductor" SMD_1210_INDUCT 19065.4,15073.31 r0 top (schematic designator L3)
L3B "Inductor" SMD_1210_INDUCT 20138.24,15073.31 r0 top (schematic designator L3)
L3C "Inductor" SMD_1210_INDUCT 21211.07,15073.31 r0 top (schematic designator L3)
L3D "Inductor" SMD_1210_INDUCT 22283.91,15073.31 r0 top (schematic designator L3)
L4A "Inductor" SMD_1210_INDUCT 18555.4,14973.31 r0 top (schematic designator L4)
L4B "Inductor" SMD_1210_INDUCT 19628.24,14973.31 r0 top (schematic designator L4)
L4C "Inductor" SMD_1210_INDUCT 20701.07,14973.31 r0 top (schematic designator L4)
L4D "Inductor" SMD_1210_INDUCT 21773.91,14973.31 r0 top (schematic designator L4)
L5 "600R" SMD_1206 23302.41,14495.63 r90 bottom
P1 "Header 5X2" HDR2X5 23965.72,14367.24 r90 top
P2 "Header 2" HDR1X2 23111,13795 r90 top
P3 "Header 12X2" HDR2X12 23963,14995 r90 top
Q1A "NJT4031N" "SOT223 w/PowerPAD" 18684.3,15961.73 r0 top (schematic designator Q1)
Q1B "NJT4031N" "SOT223 w/PowerPAD" 19471.7,15961.73 r0 top (schematic designator Q1)
Q1C "NJT4031N" "SOT223 w/PowerPAD" 20259.1,15961.73 r0 top (schematic designator Q1)
Q1D "NJT4031N" "SOT223 w/PowerPAD" 21046.5,15961.73 r0 top (schematic designator Q1)
Q1E "NJT4031N" "SOT223 w/PowerPAD" 21833.9,15961.73 r0 top (schematic designator Q1)
Q1F "NJT4031N" "SOT223 w/PowerPAD" 22621.31,15961.73 r0 top (schematic designator Q1)
Q2A "NJT4030P" "SOT223 w/PowerPAD" 18684.3,15548.35 r180 top (schematic designator Q2)
Q2B "NJT4030P" "SOT223 w/PowerPAD" 19471.7,15548.35 r180 top (schematic designator Q2)
Q2C "NJT4030P" "SOT223 w/PowerPAD" 20259.1,15548.35 r180 top (schematic designator Q2)
Q2D "NJT4030P" "SOT223 w/PowerPAD" 21046.5,15548.35 r180 top (schematic designator Q2)
Q2E "NJT4030P" "SOT223 w/PowerPAD" 21833.9,15548.35 r180 top (schematic designator Q2)
Q2F "NJT4030P" "SOT223 w/PowerPAD" 22621.31,15548.35 r180 top (schematic designator Q2)
Q3 "NJT4031N" "SOT223 w/PowerPAD" 23400.21,12969.92 r90 top
Q4 "NJT4031N" "SOT223 w/PowerPAD" 23905.21,12969.92 r270 top
Q5 "NJT4031N" "SOT223 w/PowerPAD" 23894.46,13402.84 r270 top
Q6 "FDV304P" SMD_SOT23_3 21579,12689 r90 top
R1A "Res SMD" SMD_0805 18721.94,14247.44 r90 bottom (schematic designator R1)
R1B "Res SMD" SMD_0805 19607.76,14247.44 r90 bottom (schematic designator R1)
R1C "Res SMD" SMD_0805 20493.59,14247.44 r90 bottom (schematic designator R1)
R1D "Res SMD" SMD_0805 21379.42,14247.44 r90 bottom (schematic designator R1)
R1E "Res SMD" SMD_0805 22265.24,14247.44 r90 bottom (schematic designator R1)
R1F "Res SMD" SMD_0805 18721.94,13656.89 r90 bottom (schematic designator R1)
R1G "Res SMD" SMD_0805 19607.76,13656.89 r90 bottom (schematic designator R1)
R1H "Res SMD" SMD_0805 20493.59,13656.89 r90 bottom (schematic designator R1)
R1I "Res SMD" SMD_0805 21379.42,13656.89 r90 bottom (schematic designator R1)
R1J "Res SMD" SMD_0805 22265.24,13656.89 r90 bottom (schematic designator R1)
R1K "Res SMD" SMD_0805 18721.94,13086.02 r90 bottom (schematic designator R1)
R1L "Res SMD" SMD_0805 19607.76,13086.02 r90 bottom (schematic designator R1)
R1M "Res SMD" SMD_0805 20493.59,13086.02 r90 bottom (schematic designator R1)
R1N "Res SMD" SMD_0805 21379.42,13086.02 r90 bottom (schematic designator R1)
R1O "Res SMD" SMD_0805 22265.24,13086.02 r90 bottom (schematic designator R1)
R2A "Res SMD" SMD_0805 18635.32,14247.44 r270 bottom (schematic designator R2)
R2B "Res SMD" SMD_0805 19521.15,14247.44 r270 bottom (schematic designator R2)
R2C "Res SMD" SMD_0805 20406.98,14247.44 r270 bottom (schematic designator R2)
R2D "Res SMD" SMD_0805 21292.8,14247.44 r270 bottom (schematic designator R2)
R2E "Res SMD" SMD_0805 22178.63,14247.44 r270 bottom (schematic designator R2)
R2F "Res SMD" SMD_0805 18635.32,13656.89 r270 bottom (schematic designator R2)
R2G "Res SMD" SMD_0805 19521.15,13656.89 r270 bottom (schematic designator R2)
R2H "Res SMD" SMD_0805 20406.98,13656.89 r270 bottom (schematic designator R2)
R2I "Res SMD" SMD_0805 21292.8,13656.89 r270 bottom (schematic designator R2)
R2J "Res SMD" SMD_0805 22178.63,13656.89 r270 bottom (schematic designator R2)
R2K "Res SMD" SMD_0805 18635.32,13086.02 r270 bottom (schematic designator R2)
R2L "Res SMD" SMD_0805 19521.15,13086.02 r270 bottom (schematic designator R2)
R2M "Res SMD" SMD_0805 20406.98,13086.02 r270 bottom (schematic designator R2)
R2N "Res SMD" SMD_0805 21292.8,13086.02 r270 bottom (schematic designator R2)
R2O "Res SMD" SMD_0805 22178.63,13086.02 r270 bottom (schematic designator R2)
R3A "Res SMD" SMD_0805 19255.4,15093.31 r0 top (schematic designator R3)
R3B "Res SMD" SMD_0805 20328.24,15093.31 r0 top (schematic designator R3)
R3C "Res SMD" SMD_0805 21401.07,15093.31 r0 top (schematic designator R3)
R3D "Res SMD" SMD_0805 22473.91,15093.31 r0 top (schematic designator R3)
R4A "Res SMD" SMD_0805 18555.4,14803.31 r180 top (schematic designator R4)
R4B "Res SMD" SMD_0805 19628.24,14803.31 r180 top (schematic designator R4)
R4C "Res SMD" SMD_0805 20701.07,14803.31 r180 top (schematic designator R4)
R4D "Res SMD" SMD_0805 21773.91,14803.31 r180 top (schematic designator R4)
R5A "Res SMD" SMD_0805 18555.4,14873.31 r0 top (schematic designator R5)
R5B "Res SMD" SMD_0805 19628.24,14873.31 r0 top (schematic designator R5)
R5C "Res SMD" SMD_0805 20701.07,14873.31 r0 top (schematic designator R5)
R5D "Res SMD" SMD_0805 21773.91,14873.31 r0 top (schematic designator R5)
R6A "Res SMD" SMD_0805 19255.4,15013.31 r180 top (schematic designator R6)
R6B "Res SMD" SMD_0805 20328.24,15013.31 r180 top (schematic designator R6)
R6C "Res SMD" SMD_0805 21401.07,15013.31 r180 top (schematic designator R6)
R6D "Res SMD" SMD_0805 22473.91,15013.31 r180 top (schematic designator R6)
R7A "Res SMD" SMD_0805 18497.29,15971.57 r90 bottom (schematic designator R7)
R7B "Res SMD" SMD_0805 19284.69,15971.58 r90 bottom (schematic designator R7)
R7C "Res SMD" SMD_0805 20072.09,15971.57 r90 bottom (schematic designator R7)
R7D "Res SMD" SMD_0805 20859.5,15971.58 r90 bottom (schematic designator R7)
R7E "Res SMD" SMD_0805 21646.9,15971.58 r90 bottom (schematic designator R7)
R7F "Res SMD" SMD_0805 22434.3,15971.57 r90 bottom (schematic designator R7)
R8A "Res SMD" SMD_0805 18497.29,15794.41 r90 top (schematic designator R8)
R8B "Res SMD" SMD_0805 19284.69,15794.41 r90 top (schematic designator R8)
R8C "Res SMD" SMD_0805 20072.09,15794.41 r90 top (schematic designator R8)
R8D "Res SMD" SMD_0805 20859.5,15794.41 r90 top (schematic designator R8)
R8E "Res SMD" SMD_0805 21646.9,15794.41 r90 top (schematic designator R8)
R8F "Res SMD" SMD_0805 22434.3,15794.41 r90 top (schematic designator R8)
R9A "Res SMD" SMD_0805 18861.47,15544.13 r90 bottom (schematic designator R9)
R9B "Res SMD" SMD_0805 19648.87,15544.13 r90 bottom (schematic designator R9)
R9C "Res SMD" SMD_0805 20436.27,15544.13 r90 bottom (schematic designator R9)
R9D "Res SMD" SMD_0805 21223.67,15544.13 r90 bottom (schematic designator R9)
R9E "Res SMD" SMD_0805 22011.07,15544.13 r90 bottom (schematic designator R9)
R9F "Res SMD" SMD_0805 22798.47,15544.13 r90 bottom (schematic designator R9)
R10A "Res SMD" SMD_0805 18861.47,15705.83 r90 top (schematic designator R10)
R10B "Res SMD" SMD_0805 19648.87,15705.83 r90 top (schematic designator R10)
R10C "Res SMD" SMD_0805 20436.27,15705.83 r90 top (schematic designator R10)
R10D "Res SMD" SMD_0805 21223.67,15705.83 r90 top (schematic designator R10)
R10E "Res SMD" SMD_0805 22011.07,15705.83 r90 top (schematic designator R10)
R10F "Res SMD" SMD_0805 22798.47,15705.83 r90 top (schematic designator R10)
R11 "Res SMD" SMD_0805 22638,12360 r270 top
R12A "Res SMD" SMD_0805 18507.13,16050.32 r270 top (schematic designator R12)
R12B "Res SMD" SMD_0805 19294.54,16050.31 r270 top (schematic designator R12)
R12C "Res SMD" SMD_0805 20081.94,16050.32 r270 top (schematic designator R12)
R12D "Res SMD" SMD_0805 20869.34,16050.32 r270 top (schematic designator R12)
R12E "Res SMD" SMD_0805 21656.74,16050.31 r270 top (schematic designator R12)
R12F "Res SMD" SMD_0805 22444.14,16050.32 r270 top (schematic designator R12)
R13A "Res SMD" SMD_0805 18860.48,15870.2 r270 top (schematic designator R13)
R13B "Res SMD" SMD_0805 19647.88,15870.2 r270 top (schematic designator R13)
R13C "Res SMD" SMD_0805 20435.28,15870.2 r270 top (schematic designator R13)
R13D "Res SMD" SMD_0805 21222.69,15870.2 r270 top (schematic designator R13)
R13E "Res SMD" SMD_0805 22010.09,15870.2 r270 top (schematic designator R13)
R13F "Res SMD" SMD_0805 22797.49,15870.2 r270 top (schematic designator R13)
R14A "Res SMD" SMD_0805 18862.88,15873.15 r90 bottom (schematic designator R14)
R14B "Res SMD" SMD_0805 19650.28,15873.15 r90 bottom (schematic designator R14)
R14C "Res SMD" SMD_0805 20437.68,15873.15 r90 bottom (schematic designator R14)
R14D "Res SMD" SMD_0805 21225.08,15873.15 r90 bottom (schematic designator R14)
R14E "Res SMD" SMD_0805 22012.48,15873.15 r90 bottom (schematic designator R14)
R14F "Res SMD" SMD_0805 22799.89,15873.15 r90 bottom (schematic designator R14)
R15 "Res SMD" SMD_0805 23494.19,12894.92 r90 bottom
R16 "Res SMD" SMD_0805 23365.21,12894.92 r270 bottom
R17A "Res SMD" SMD_0805 18400,15684 r180 top (schematic designator R17)
R17B "Res SMD" SMD_0805 19170,15665 r180 top (schematic designator R17)
R17C "Res SMD" SMD_0805 19957.4,15665 r180 top (schematic designator R17)
R17D "Res SMD" SMD_0805 20744.8,15665 r180 top (schematic designator R17)
R17E "Res SMD" SMD_0805 21532.2,15665 r180 top (schematic designator R17)
R17F "Res SMD" SMD_0805 22319.61,15665 r180 top (schematic designator R17)
R18 "Res SMD" SMD_0805 23830.21,13044.92 r270 bottom
R19 "Res SMD" SMD_0805 23895.21,13044.92 r90 bottom
R20A "Res SMD" SMD_0805 18861.47,15499.13 r270 top (schematic designator R20)
R20B "Res SMD" SMD_0805 19648.87,15499.13 r270 top (schematic designator R20)
R20C "Res SMD" SMD_0805 20436.27,15499.13 r270 top (schematic designator R20)
R20D "Res SMD" SMD_0805 21223.67,15499.13 r270 top (schematic designator R20)
R20E "Res SMD" SMD_0805 22011.07,15499.13 r270 top (schematic designator R20)
R20F "Res SMD" SMD_0805 22798.47,15499.13 r270 top (schematic designator R20)
R21 "Res SMD" SMD_0805 23872,13745 r0 top
R22 "Res SMD" SMD_0805 23872,13680 r180 top
R23A "Res SMD" SMD_0805 18399,15657 r0 bottom (schematic designator R23)
R23B "Res SMD" SMD_0805 19168,15641 r0 bottom (schematic designator R23)
R23C "Res SMD" SMD_0805 19955.4,15641 r0 bottom (schematic designator R23)
R23D "Res SMD" SMD_0805 20742.8,15641 r0 bottom (schematic designator R23)
R23E "Res SMD" SMD_0805 21530.2,15641 r0 bottom (schematic designator R23)
R23F "Res SMD" SMD_0805 22317.61,15641 r0 bottom (schematic designator R23)
R24 "Res SMD" SMD_0805 23617,13775 r0 bottom
R25 "Res SMD" SMD_0805 23767,13775 r180 bottom
R26 "Res 0805" SMD_0805 23869,13875 r180 top
R27 "Res SMD" SMD_0805 23765.21,13044.92 r90 bottom
R28 "Res SMD" SMD_0805 23430.21,13044.92 r270 bottom
R29 "Res SMD" SMD_0805 23494.19,13044.92 r270 bottom
R30 "Res SMD" SMD_0805 23365.21,13044.92 r90 bottom
R31 "Res SMD" SMD_0805 23650.21,12889.92 r270 top
R32 "Res SMD" SMD_0805 23650.21,13039.92 r270 top
R33 "Res SMD" SMD_0805 23960.21,12894.92 r270 bottom
R34 "Res SMD" SMD_0805 23765.21,12894.92 r90 bottom
R35 "Res SMD" SMD_0805 23830.21,12894.92 r270 bottom
R36 "Res 0805" SMD_0805 23868,13865 r0 bottom
R37 "Res SMD" SMD_0805 23774.46,13367.84 r0 bottom
R38 "Res 0805" SMD_0805 23867,13935 r180 bottom
R39 "Res SMD" SMD_0805 23939.46,13497.84 r180 bottom
R40 "Res SMD" SMD_0805 23774.46,13302.84 r180 bottom
R41 "Res SMD" SMD_0805 23594.46,13337.84 r0 bottom
R42 "Res SMD" SMD_0805 23594.46,13402.84 r0 bottom
R43 "Res SMD" SMD_0805 23774.46,13497.84 r0 bottom
R44 "Res SMD" SMD_0805 23894.46,13387.84 r270 bottom
R45 "Res SMD" SMD_0805 18731.46,12490.51 r90 top
R46 "Res SMD" SMD_0805 18666.46,12490.51 r270 top
R47 "Res SMD" SMD_0805 18361.46,12495.51 r90 top
R48 "Res 0805" SMD_0805 23768,13162.04 r180 bottom
RN1 "RES ARRAY  x4" "RES ARRAY 0603 x 4" 23867,14202.71 r270 top
TP1A "Test Point SMD" "SMD_TEST POINT" 18871.31,16050.32 r90 top (schematic designator TP1)
TP1B "Test Point SMD" "SMD_TEST POINT" 19658.71,16050.31 r90 top (schematic designator TP1)
TP1C "Test Point SMD" "SMD_TEST POINT" 20446.11,16050.32 r90 top (schematic designator TP1)
TP1D "Test Point SMD" "SMD_TEST POINT" 21233.51,16050.32 r90 top (schematic designator TP1)
TP1E "Test Point SMD" "SMD_TEST POINT" 22020.91,16050.31 r90 top (schematic designator TP1)
TP1F "Test Point SMD" "SMD_TEST POINT" 22808.31,16050.32 r90 top (schematic designator TP1)
TP2A "Test Point SMD" "SMD_TEST POINT" 18497.29,15458.35 r270 top (schematic designator TP2)
TP2B "Test Point SMD" "SMD_TEST POINT" 19284.69,15458.35 r270 top (schematic designator TP2)
TP2C "Test Point SMD" "SMD_TEST POINT" 20072.09,15458.35 r270 top (schematic designator TP2)
TP2D "Test Point SMD" "SMD_TEST POINT" 20859.5,15458.35 r270 top (schematic designator TP2)
TP2E "Test Point SMD" "SMD_TEST POINT" 21646.9,15458.35 r270 top (schematic designator TP2)
TP2F "Test Point SMD" "SMD_TEST POINT" 22434.3,15458.35 r270 top (schematic designator TP2)
TP3A "Test Point SMD" "SMD_TEST POINT" 18507.37,14493.5 r180 top (schematic designator TP3)
TP3B "Test Point SMD" "SMD_TEST POINT" 19393.2,14493.5 r180 top (schematic designator TP3)
TP3C "Test Point SMD" "SMD_TEST POINT" 20279.02,14493.5 r180 top (schematic designator TP3)
TP3D "Test Point SMD" "SMD_TEST POINT" 21164.85,14493.5 r180 top (schematic designator TP3)
TP3E "Test Point SMD" "SMD_TEST POINT" 22050.68,14493.5 r180 top (schematic designator TP3)
TP3F "Test Point SMD" "SMD_TEST POINT" 18507.37,13902.95 r180 top (schematic designator TP3)
TP3G "Test Point SMD" "SMD_TEST POINT" 19393.2,13902.95 r180 top (schematic designator TP3)
TP3H "Test Point SMD" "SMD_TEST POINT" 20279.02,13902.95 r180 top (schematic designator TP3)
TP3I "Test Point SMD" "SMD_TEST POINT" 21164.85,13902.95 r180 top (schematic designator TP3)
TP3J "Test Point SMD" "SMD_TEST POINT" 22050.68,13902.95 r180 top (schematic designator TP3)
TP3K "Test Point SMD" "SMD_TEST POINT" 18507.37,13332.09 r180 top (schematic designator TP3)
TP3L "Test Point SMD" "SMD_TEST POINT" 19393.2,13332.09 r180 top (schematic designator TP3)
TP3M "Test Point SMD" "SMD_TEST POINT" 20279.02,13332.09 r180 top (schematic designator TP3)
TP3N "Test Point SMD" "SMD_TEST POINT" 21164.85,13332.09 r180 top (schematic designator TP3)
TP3O "Test Point SMD" "SMD_TEST POINT" 22050.68,13332.09 r180 top (schematic designator TP3)
TP4A "Test Point SMD" "SMD_TEST POINT" 18565.4,15103.31 r0 top (schematic designator TP4)
TP4B "Test Point SMD" "SMD_TEST POINT" 19638.24,15103.31 r0 top (schematic designator TP4)
TP4C "Test Point SMD" "SMD_TEST POINT" 20711.07,15103.31 r0 top (schematic designator TP4)
TP4D "Test Point SMD" "SMD_TEST POINT" 21783.91,15103.31 r0 top (schematic designator TP4)
TP5 "Test Point SMD" "SMD_TEST POINT" 23520.21,13154.92 r0 top
TP6 "Test Point SMD" "SMD_TEST POINT" 23780.21,12789.92 r0 top
TP7 "Test Point SMD" "SMD_TEST POINT" 23997,13780 r90 top
TP8 "Test Point SMD" "SMD_TEST POINT" 23370,13458 r90 top
TP9 "Test Point SMD" "SMD_TEST POINT" 18336.96,12635 r180 top
TP10 "Test Point SMD" "SMD_TEST POINT" 18706.96,12630 r180 top
TP11 "Test Point SMD" "SMD_TEST POINT" 19094,15996 r270 top
TP12 "Test Point SMD" "SMD_TEST POINT" 21441,16019 r90 top
TP13 "Test Point SMD" "SMD_TEST POINT" 23019,16007 r90 top
TP14 "Test Point SMD" "SMD_TEST POINT" 18362,16018 r90 top
TP15 "Test Point SMD" "SMD_TEST POINT" 22987,15340 r90 top
TP16 "Test Point SMD" "SMD_TEST POINT" 18537,15288 r0 top
TP17 "Test Point SMD" "SMD_TEST POINT" 22215,15383 r0 top
TP18 "Test Point SMD" "SMD_TEST POINT" 23024,13606 r0 top
TP19 "Test Point SMD" "SMD_TEST POINT" 23289,13781 r0 top
TP20 "Test Point SMD" "SMD_TEST POINT" 22392,12647 r0 top
TP21 "Test Point SMD" "SMD_TEST POINT" 19110,15301 r0 top
U1A "LM3480IM3-5.0" SOT23A 18842.02,14473.82 r0 top (schematic designator U1)
U1B "LM3480IM3-5.0" SOT23A 19727.84,14473.82 r0 top (schematic designator U1)
U1C "LM3480IM3-5.0" SOT23A 20613.67,14473.82 r0 top (schematic designator U1)
U1D "LM3480IM3-5.0" SOT23A 21499.5,14473.82 r0 top (schematic designator U1)
U1E "LM3480IM3-5.0" SOT23A 22385.32,14473.82 r0 top (schematic designator U1)
U1F "LM3480IM3-5.0" SOT23A 18842.02,13883.27 r0 top (schematic designator U1)
U1G "LM3480IM3-5.0" SOT23A 19727.84,13883.27 r0 top (schematic designator U1)
U1H "LM3480IM3-5.0" SOT23A 20613.67,13883.27 r0 top (schematic designator U1)
U1I "LM3480IM3-5.0" SOT23A 21499.5,13883.27 r0 top (schematic designator U1)
U1J "LM3480IM3-5.0" SOT23A 22385.32,13883.27 r0 top (schematic designator U1)
U1K "LM3480IM3-5.0" SOT23A 18842.02,13312.4 r0 top (schematic designator U1)
U1L "LM3480IM3-5.0" SOT23A 19727.84,13312.4 r0 top (schematic designator U1)
U1M "LM3480IM3-5.0" SOT23A 20613.67,13312.4 r0 top (schematic designator U1)
U1N "LM3480IM3-5.0" SOT23A 21499.5,13312.4 r0 top (schematic designator U1)
U1O "LM3480IM3-5.0" SOT23A 22385.32,13312.4 r0 top (schematic designator U1)
U2A "FOD0708" 182H_M 18753.43,14296.65 r0 top (schematic designator U2)
U2B "FOD0708" 182H_M 19639.26,14296.65 r0 top (schematic designator U2)
U2C "FOD0708" 182H_M 20525.09,14296.65 r0 top (schematic designator U2)
U2D "FOD0708" 182H_M 21410.91,14296.65 r0 top (schematic designator U2)
U2E "FOD0708" 182H_M 22296.74,14296.65 r0 top (schematic designator U2)
U2F "FOD0708" 182H_M 18753.43,13706.1 r0 top (schematic designator U2)
U2G "FOD0708" 182H_M 19639.26,13706.1 r0 top (schematic designator U2)
U2H "FOD0708" 182H_M 20525.09,13706.1 r0 top (schematic designator U2)
U2I "FOD0708" 182H_M 21410.91,13706.1 r0 top (schematic designator U2)
U2J "FOD0708" 182H_M 22296.74,13706.1 r0 top (schematic designator U2)
U2K "FOD0708" 182H_M 18753.43,13135.24 r0 top (schematic designator U2)
U2L "FOD0708" 182H_M 19639.26,13135.24 r0 top (schematic designator U2)
U2M "FOD0708" 182H_M 20525.09,13135.24 r0 top (schematic designator U2)
U2N "FOD0708" 182H_M 21410.91,13135.24 r0 top (schematic designator U2)
U2O "FOD0708" 182H_M 22296.74,13135.24 r0 top (schematic designator U2)
U3A "IXDN404" 182H_M 18753.43,14424.61 r180 bottom (schematic designator U3)
U3B "IXDN404" 182H_M 19639.26,14424.61 r180 bottom (schematic designator U3)
U3C "IXDN404" 182H_M 20525.09,14424.61 r180 bottom (schematic designator U3)
U3D "IXDN404" 182H_M 21410.91,14424.61 r180 bottom (schematic designator U3)
U3E "IXDN404" 182H_M 22296.74,14424.61 r180 bottom (schematic designator U3)
U3F "IXDN404" 182H_M 18753.43,13834.06 r180 bottom (schematic designator U3)
U3G "IXDN404" 182H_M 19639.26,13834.06 r180 bottom (schematic designator U3)
U3H "IXDN404" 182H_M 20525.09,13834.06 r180 bottom (schematic designator U3)
U3I "IXDN404" 182H_M 21410.91,13834.06 r180 bottom (schematic designator U3)
U3J "IXDN404" 182H_M 22296.74,13834.06 r180 bottom (schematic designator U3)
U3K "IXDN404" 182H_M 18753.43,13263.19 r180 bottom (schematic designator U3)
U3L "IXDN404" 182H_M 19639.26,13263.19 r180 bottom (schematic designator U3)
U3M "IXDN404" 182H_M 20525.09,13263.19 r180 bottom (schematic designator U3)
U3N "IXDN404" 182H_M 21410.91,13263.19 r180 bottom (schematic designator U3)
U3O "IXDN404" 182H_M 22296.74,13263.19 r180 bottom (schematic designator U3)
U4A "LM3480IM3-5.0" SOT23A 18815.4,15073.31 r0 top (schematic designator U4)
U4B "LM3480IM3-5.0" SOT23A 19888.24,15073.31 r0 top (schematic designator U4)
U4C "LM3480IM3-5.0" SOT23A 20961.07,15073.31 r0 top (schematic designator U4)
U4D "LM3480IM3-5.0" SOT23A 22033.91,15073.31 r0 top (schematic designator U4)
U5A "FOD0708" 182H_M 19265.4,14993.31 r270 bottom (schematic designator U5)
U5B "FOD0708" 182H_M 20338.24,14993.31 r270 bottom (schematic designator U5)
U5C "FOD0708" 182H_M 21411.07,14993.31 r270 bottom (schematic designator U5)
U5D "FOD0708" 182H_M 22483.91,14993.31 r270 bottom (schematic designator U5)
U6A "IXDN404" 182H_M 18775.4,14993.31 r270 bottom (schematic designator U6)
U6B "IXDN404" 182H_M 19848.24,14993.31 r270 bottom (schematic designator U6)
U6C "IXDN404" 182H_M 20921.07,14993.31 r270 bottom (schematic designator U6)
U6D "IXDN404" 182H_M 21993.91,14993.31 r270 bottom (schematic designator U6)
U7A "FOD0708" 182H_M 19125.4,14873.31 r0 top (schematic designator U7)
U7B "FOD0708" 182H_M 20198.24,14873.31 r0 top (schematic designator U7)
U7C "FOD0708" 182H_M 21271.07,14873.31 r0 top (schematic designator U7)
U7D "FOD0708" 182H_M 22343.91,14873.31 r0 top (schematic designator U7)
U8A "LT1124CS8" S8_N 18674.46,15755.04 r180 bottom (schematic designator U8)
U8B "LT1124CS8" S8_N 19461.86,15755.04 r180 bottom (schematic designator U8)
U8C "LT1124CS8" S8_N 20249.26,15755.04 r180 bottom (schematic designator U8)
U8D "LT1124CS8" S8_N 21036.66,15755.04 r180 bottom (schematic designator U8)
U8E "LT1124CS8" S8_N 21824.06,15755.04 r180 bottom (schematic designator U8)